# Allegro board A527_REF_LPDDR3_256ball_64X1_S6L_V3_0-C0201.brd
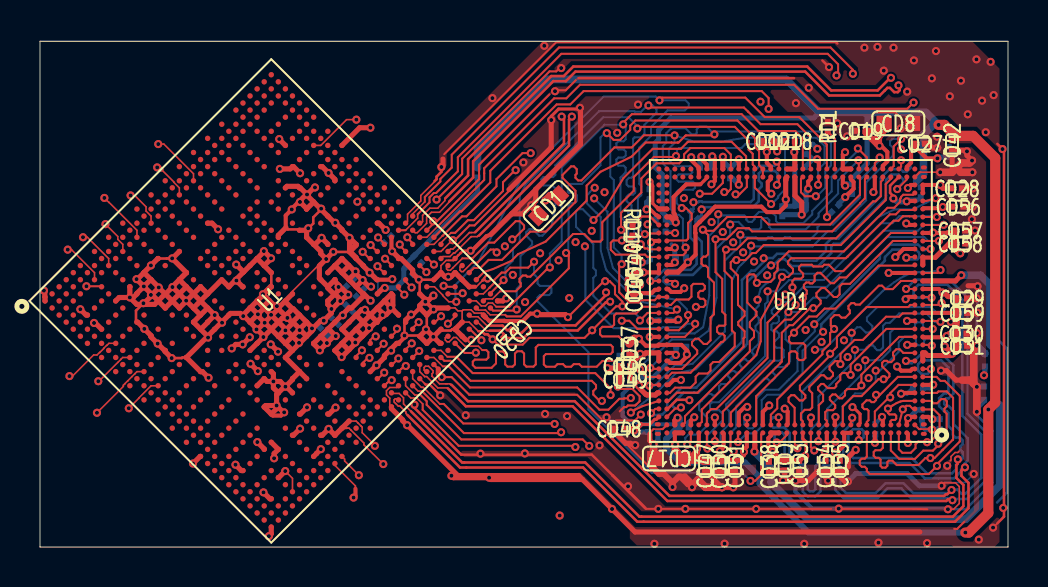
[diagram p0: board, top side]
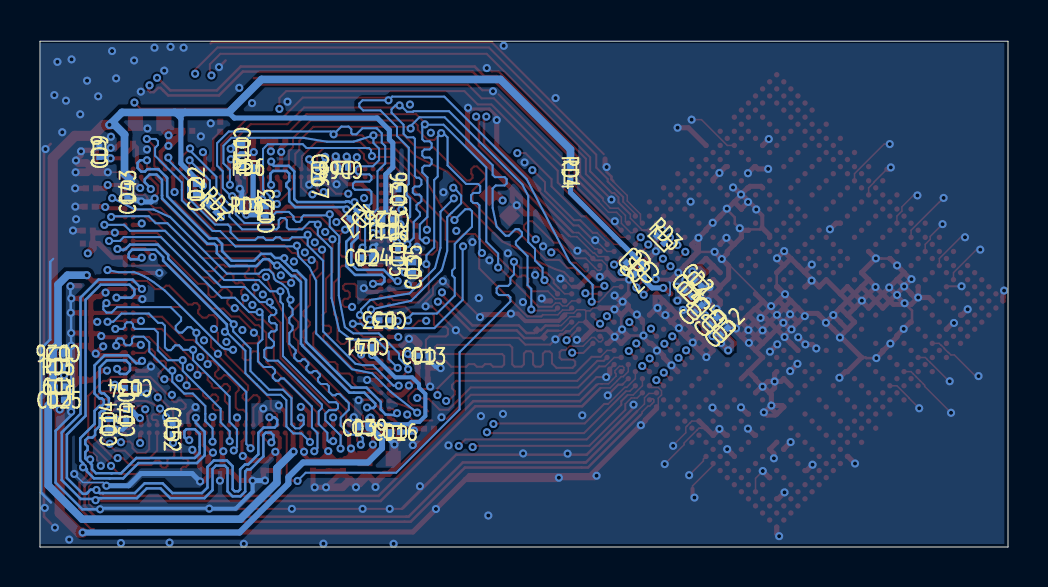
[diagram p1: board, bottom side, seen from below]

Outline 48.41 x 25.3 mm; copper layers: TOP, L2GND, L3, L4, L5GND, BOTTOM. Coordinates in mm from the lower left corner of the outline.
Outline path: 0,25.3 0,0 48.41,0 48.41,25.3 0,25.3

## Design rules (mm)
net group SA: nets SODT2

## Placement (name value [footprint] x y rotation side)
CD1  10uF  [C0603]  25.43 17.07 225 top
CD2  2.2uF  [C0201]  15.5 13.22 225 bottom
CD3  NC/2.2uF  [C0201]  15.49 11.92 135 bottom
CD4  100nF  [C0201]  16 12.72 225 bottom
CD5  100nF  [C0201]  14.73 11.31 135 bottom
CD6  2.2uF  [C0201]  18.89 14.39 315 bottom
CD7  100nF  [C0201]  18.47 13.83 315 bottom
CD8  10uF  [C0603]  42.92 21.19 0 top
CD9  2.2uF  [C0201]  45.44 19.76 90 bottom
CD10  2.2uF  [C0201]  38.3 19.9 90 bottom
CD11  2.2uF  [C0201]  37.23 4.08 270 top
CD12  2.2uF  [C0201]  36.39 20.3 0 top
CD13  2.2uF  [C0201]  29.23 9.57 180 bottom
CD14  2.2uF  [C0201]  45 6.15 270 bottom
CD15  100nF  [C0201]  30.5 14.64 270 bottom
CD16  100nF  [C0201]  30.65 5.75 0 bottom
CD17  10uF  [C0603]  31.45 4.43 180 top
CD18  100nF  [C0201]  37.5 20.3 180 top
CD19  100nF  [C0201]  41.04 20.82 180 top
CD20  NC/2.2pF  [C0201]  23.38 10.67 225 top
CD21  2.2uF  [C0201]  31.04 16.38 180 bottom
CD22  100nF  [C0201]  40.61 17.91 270 bottom
CD23  100nF  [C0201]  37.12 16.8 270 bottom
CD24  2.2uF  [C0201]  32.05 14.49 180 bottom
CD25  100nF  [C0201]  47.46 7.37 180 bottom
CD26  2.2uF  [C0201]  47.5 9.68 180 bottom
CD27  100nF  [C0201]  44.01 20.18 0 top
CD28  100nF  [C0201]  45.86 17.94 0 top
CD29  100nF  [C0201]  46.11 12.43 0 top
CD30  100nF  [C0201]  46.09 10.67 0 top
CD31  100nF  [C0201]  46.11 10.07 0 top
CD32  100nF  [C0201]  14.2 10.78 135 bottom
CD33  100nF  [C0201]  31.19 11.34 0 bottom
CD34  100nF  [C0201]  43.9 7.96 180 bottom
CD35  100nF  [C0201]  29.75 14 90 bottom
CD36  100nF  [C0201]  30.49 17.65 90 bottom
CD37  100nF  [C0201]  29.47 9.92 90 top
CD38  100nF  [C0201]  36.45 4.02 270 top
CD39  100nF  [C0201]  32.19 5.98 0 bottom
CD40  100nF  [C0201]  44.1 6.62 270 bottom
CD41  100nF  [C0201]  32.06 10.02 0 bottom
CD42  100nF  [C0201]  45.6 20.1 270 top
CD43  100nF  [C0201]  44.04 17.74 270 bottom
CD44  100nF  [C0201]  29.72 14.03 90 top
CD45  100nF  [C0201]  29.7 12.86 90 top
CD46  100nF  [C0201]  29.27 9.05 180 top
CD47  100nF  [C0201]  33.26 4.06 270 top
CD48  100nF  [C0201]  28.95 5.92 180 top
CD49  100nF  [C0201]  29.27 8.37 180 top
CD50  100nF  [C0201]  33.98 4.03 270 top
CD51  100nF  [C0201]  34.75 4.06 270 top
CD52  100nF  [C0201]  41.77 5.89 90 bottom
CD53  100nF  [C0201]  37.97 4.06 270 top
CD54  100nF  [C0201]  39.28 4.06 270 top
CD55  100nF  [C0201]  39.99 4.06 270 top
CD56  100nF  [C0201]  45.92 17.03 0 top
CD57  100nF  [C0201]  46.02 15.83 0 top
CD58  100nF  [C0201]  46.02 15.18 0 top
CD59  100nF  [C0201]  46.11 11.71 0 top
CD67  100nF  [C0201]  34.51 18.69 270 bottom
CD68  100nF  [C0201]  33.25 18.98 0 bottom
NOREF  -  []  48.41 0 90 top
NOREF#2  -  []  0 25.3 0 top
RD1  240R-1%  [R0201]  39.39 21.02 270 top
RD2  240R-1%  [R0201]  39.77 16.93 225 bottom
RD3  120R-1%  [R0201]  17.38 15.38 225 bottom
RD4  NC/0R  [R0201]  21.88 18.73 90 bottom
RD5  2K-1%  [R0201]  47.5 9.03 180 bottom
RD6  2K-1%  [R0201]  38 19.01 0 bottom
RD7  100R  [R0201]  32.72 16.59 315 bottom
RD8  2K-1%  [R0201]  38.06 17.09 180 bottom
RD9  2K-1%  [R0201]  47.46 8.03 0 bottom
RD10  240R-1%  [R0201]  29.63 15.83 90 top
RD11  240R-1%  [R0201]  31.03 15.78 0 bottom
U1  A527  [BGA664P50B1700_1700H180]  11.57 12.31 45 top
UD1  LPDDR3-POP256  [BGA256P40B1400_1400H85]  37.55 12.31 180 top

## Library data of the parts
CD1-CD59 CD67 CD68 = C-C0402
RD1-RD11 = R-R0402-1%
U1 = T527/MR527-V1: signal model: BGA-15X15-V1_1_15X15_(S1+S2+S3+_BGA-15x15-V1_1
UD1 = LPDDR3-POP256

## Footprints (pads in the part's own frame, mm; a bottom-side part is the same pattern mirrored in y, then rotated)
BGA256P40B1400_1400H85
  oval 0.3x0.2 smd: A1(-6.65,6.65) A34(6.65,6.65) AN1(-6.65,-6.2) AP1(-6.65,-6.676) B1(-6.65,6.174) B34(6.65,6.174)
  round 0.25 smd: A2(-6.2,6.6) A3(-5.8,6.6) A4(-5.4,6.6) A5(-5,6.6) A6(-4.6,6.6) A7(-4.2,6.6) A8(-3.8,6.6) A9(-3.4,6.6) A10(-3,6.6) A11(-2.6,6.6) A12(-2.2,6.6) A13(-1.8,6.6) A14(-1.4,6.6) A15(-1,6.6) A16(-0.6,6.6) A17(-0.2,6.6) A18(0.2,6.6) A19(0.6,6.6) A20(1,6.6) A21(1.4,6.6) A22(1.8,6.6) A23(2.2,6.6) A24(2.6,6.6) A25(3,6.6) A26(3.4,6.6) A27(3.8,6.6) A28(4.2,6.6) A29(4.6,6.6) A30(5,6.6) A31(5.4,6.6) A32(5.8,6.6) A33(6.2,6.6) AA1(-6.6,-1.4) AA2(-6.2,-1.4) AA33(6.2,-1.4) AA34(6.6,-1.4) AB1(-6.6,-1.8) AB2(-6.2,-1.8) AB33(6.2,-1.8) AB34(6.6,-1.8) AC1(-6.6,-2.2) AC2(-6.2,-2.2) AC33(6.2,-2.2) AC34(6.6,-2.2) AD1(-6.6,-2.6) AD2(-6.2,-2.6) AD33(6.2,-2.6) AD34(6.6,-2.6) AE1(-6.6,-3) AE2(-6.2,-3) AE33(6.2,-3) AE34(6.6,-3) AF1(-6.6,-3.4) AF2(-6.2,-3.4) AF33(6.2,-3.4) AF34(6.6,-3.4) AG1(-6.6,-3.8) AG2(-6.2,-3.8) AG33(6.2,-3.8) AG34(6.6,-3.8) AH1(-6.6,-4.2) AH2(-6.2,-4.2) AH33(6.2,-4.2) AH34(6.6,-4.2) AJ1(-6.6,-4.6) AJ2(-6.2,-4.6) AJ33(6.2,-4.6) AJ34(6.6,-4.6) AK1(-6.6,-5) AK2(-6.2,-5) AK33(6.2,-5) AK34(6.6,-5) AL1(-6.6,-5.4) AL2(-6.2,-5.4) AL33(6.2,-5.4) AL34(6.6,-5.4) AM1(-6.6,-5.8) AM2(-6.2,-5.8) AM33(6.2,-5.8) AM34(6.6,-5.8) AN2(-6.2,-6.2) AN3(-5.8,-6.2) AN4(-5.4,-6.2) AN5(-5,-6.2) AN6(-4.6,-6.2) AN7(-4.2,-6.2) AN8(-3.8,-6.2) AN9(-3.4,-6.2) AN10(-3,-6.2) AN11(-2.6,-6.2) AN12(-2.2,-6.2) AN13(-1.8,-6.2) AN14(-1.4,-6.2) AN15(-1,-6.2) AN16(-0.6,-6.2) AN17(-0.2,-6.2) AN18(0.2,-6.2) AN19(0.6,-6.2) AN20(1,-6.2) AN21(1.4,-6.2) AN22(1.8,-6.2) AN23(2.2,-6.2) AN24(2.6,-6.2) AN25(3,-6.2) AN26(3.4,-6.2) AN27(3.8,-6.2) AN28(4.2,-6.2) AN29(4.6,-6.2) AN30(5,-6.2) AN31(5.4,-6.2) AN32(5.8,-6.2) AN33(6.2,-6.2) AN34(6.6,-6.2) AP2(-6.2,-6.6) AP3(-5.8,-6.6) AP4(-5.4,-6.6) AP5(-5,-6.6) AP6(-4.6,-6.6) AP7(-4.2,-6.6) AP8(-3.8,-6.6) AP9(-3.4,-6.6) AP10(-3,-6.6) AP11(-2.6,-6.6) AP12(-2.2,-6.6) AP13(-1.8,-6.6) AP14(-1.4,-6.6) AP15(-1,-6.6) AP16(-0.6,-6.6) AP17(-0.2,-6.6) AP18(0.2,-6.6) AP19(0.6,-6.6) AP20(1,-6.6) AP21(1.4,-6.6) AP22(1.8,-6.6) AP23(2.2,-6.6) AP24(2.6,-6.6) AP25(3,-6.6) AP26(3.4,-6.6) AP27(3.8,-6.6) AP28(4.2,-6.6) AP29(4.6,-6.6) AP30(5,-6.6) AP31(5.4,-6.6) AP32(5.8,-6.6) AP33(6.2,-6.6) AP34(6.6,-6.6) B2(-6.2,6.2) B3(-5.8,6.2) B4(-5.4,6.2) B5(-5,6.2) B6(-4.6,6.2) B7(-4.2,6.2) B8(-3.8,6.2) B9(-3.4,6.2) B10(-3,6.2) B11(-2.6,6.2) B12(-2.2,6.2) B13(-1.8,6.2) B14(-1.4,6.2) B15(-1,6.2) B16(-0.6,6.2) B17(-0.2,6.2) B18(0.2,6.2) B19(0.6,6.2) B20(1,6.2) B21(1.4,6.2) B22(1.8,6.2) B23(2.2,6.2) B24(2.6,6.2) B25(3,6.2) B26(3.4,6.2) B27(3.8,6.2) B28(4.2,6.2) B29(4.6,6.2) B30(5,6.2) B31(5.4,6.2) B32(5.8,6.2) B33(6.2,6.2) C1(-6.6,5.8) C2(-6.2,5.8) C33(6.2,5.8) C34(6.6,5.8) D1(-6.6,5.4) D2(-6.2,5.4) D33(6.2,5.4) D34(6.6,5.4) E1(-6.6,5) E2(-6.2,5) E33(6.2,5) E34(6.6,5) F1(-6.6,4.6) F2(-6.2,4.6) F33(6.2,4.6) F34(6.6,4.6) G1(-6.6,4.2) G2(-6.2,4.2) G33(6.2,4.2) G34(6.6,4.2) H1(-6.6,3.8) H2(-6.2,3.8) H33(6.2,3.8) H34(6.6,3.8) J1(-6.6,3.4) J2(-6.2,3.4) J33(6.2,3.4) J34(6.6,3.4) K1(-6.6,3) K2(-6.2,3) K33(6.2,3) K34(6.6,3) L1(-6.6,2.6) L2(-6.2,2.6) L33(6.2,2.6) L34(6.6,2.6) M1(-6.6,2.2) M2(-6.2,2.2) M33(6.2,2.2) M34(6.6,2.2) N1(-6.6,1.8) N2(-6.2,1.8) N33(6.2,1.8) N34(6.6,1.8) P1(-6.6,1.4) P2(-6.2,1.4) P33(6.2,1.4) P34(6.6,1.4) R1(-6.6,1) R2(-6.2,1) R33(6.2,1) R34(6.6,1) T1(-6.6,0.6) T2(-6.2,0.6) T33(6.2,0.6) T34(6.6,0.6) U1(-6.6,0.2) U2(-6.2,0.2) U33(6.2,0.2) U34(6.6,0.2) V1(-6.6,-0.2) V2(-6.2,-0.2) V33(6.2,-0.2) V34(6.6,-0.2) W1(-6.6,-0.6) W2(-6.2,-0.6) W33(6.2,-0.6) W34(6.6,-0.6) Y1(-6.6,-1) Y2(-6.2,-1) Y33(6.2,-1) Y34(6.6,-1)
BGA664P50B1700_1700H180
  round 0.27 smd: A1(-8,8) A2(-7.5,8) A3(-7,8) A4(-6.5,8) A5(-6,8) A6(-5.5,8) A8(-4.5,8) A10(-3.5,8) A12(-2.5,8) A14(-1.5,8) A16(-0.5,8) A18(0.5,8) A20(1.5,8) A22(2.5,8) A24(3.5,8) A26(4.5,8) A28(5.5,8) A29(6,8) A30(6.5,8) A31(7,8) A32(7.5,8) A33(8,8) AA1(-8,-2) AA2(-7.5,-2) AA3(-7,-2) AA4(-6.5,-2) AA5(-6,-2) AA6(-5.5,-2) AA7(-5,-2) AA9(-4,-2) AA12(-2.5,-2) AA13(-2,-2) AA15(-1,-2) AA16(-0.5,-2) AA18(0.5,-2) AA19(1,-2) AA21(2,-2) AA22(2.5,-2) AA24(3.5,-2) AA26(4.5,-2) AA27(5,-2) AA28(5.5,-2) AA29(6,-2) AA30(6.5,-2) AA31(7,-2) AA32(7.5,-2) AA33(8,-2) AB2(-7.5,-2.5) AB3(-7,-2.5) AB9(-4,-2.5) AB10(-3.5,-2.5) AB11(-3,-2.5) AB12(-2.5,-2.5) AB13(-2,-2.5) AB14(-1.5,-2.5) AB15(-1,-2.5) AB17(0,-2.5) AB24(3.5,-2.5) AB32(7.5,-2.5) AB33(8,-2.5) AC1(-8,-3) AC2(-7.5,-3) AC3(-7,-3) AC4(-6.5,-3) AC5(-6,-3) AC6(-5.5,-3) AC7(-5,-3) AC9(-4,-3) AC15(-1,-3) AC17(0,-3) AC18(0.5,-3) AC19(1,-3) AC20(1.5,-3) AC22(2.5,-3) AC24(3.5,-3) AC26(4.5,-3) AC27(5,-3) AC28(5.5,-3) AC29(6,-3) AC30(6.5,-3) AC31(7,-3) AC32(7.5,-3) AC33(8,-3) AD1(-8,-3.5) AD2(-7.5,-3.5) AD9(-4,-3.5) AD11(-3,-3.5) AD13(-2,-3.5) AD14(-1.5,-3.5) AD15(-1,-3.5) AD20(1.5,-3.5) AD21(2,-3.5) AD22(2.5,-3.5) AD25(4,-3.5) AD32(7.5,-3.5) AD33(8,-3.5) AE1(-8,-4) AE2(-7.5,-4) AE3(-7,-4) AE4(-6.5,-4) AE5(-6,-4) AE6(-5.5,-4) AE7(-5,-4) AE9(-4,-4) AE11(-3,-4) AE12(-2.5,-4) AE13(-2,-4) AE14(-1.5,-4) AE16(-0.5,-4) AE18(0.5,-4) AE19(1,-4) AE20(1.5,-4) AE21(2,-4) AE22(2.5,-4) AE23(3,-4) AE24(3.5,-4) AE25(4,-4) AE26(4.5,-4) AE27(5,-4) AE28(5.5,-4) AE29(6,-4) AE30(6.5,-4) AE31(7,-4) AE32(7.5,-4) AE33(8,-4) AF1(-8,-4.5) AF2(-7.5,-4.5) AF32(7.5,-4.5) AF33(8,-4.5) AG1(-8,-5) AG2(-7.5,-5) AG3(-7,-5) AG4(-6.5,-5) AG5(-6,-5) AG6(-5.5,-5) AG7(-5,-5) AG9(-4,-5) AG11(-3,-5) AG13(-2,-5) AG15(-1,-5) AG17(0,-5) AG19(1,-5) AG21(2,-5) AG23(3,-5) AG25(4,-5) AG28(5.5,-5) AG29(6,-5) AG30(6.5,-5) AG31(7,-5) AG32(7.5,-5) AG33(8,-5) AH1(-8,-5.5) AH2(-7.5,-5.5) AH7(-5,-5.5) AH9(-4,-5.5) AH11(-3,-5.5) AH13(-2,-5.5) AH15(-1,-5.5) AH17(0,-5.5) AH19(1,-5.5) AH21(2,-5.5) AH23(3,-5.5) AH25(4,-5.5) AH27(5,-5.5) AH32(7.5,-5.5) AH33(8,-5.5) AJ1(-8,-6) AJ2(-7.5,-6) AJ3(-7,-6) AJ4(-6.5,-6) AJ5(-6,-6) AJ7(-5,-6) AJ9(-4,-6) AJ11(-3,-6) AJ13(-2,-6) AJ15(-1,-6) AJ17(0,-6) AJ19(1,-6) AJ21(2,-6) AJ23(3,-6) AJ25(4,-6) AJ27(5,-6) AJ30(6.5,-6) AJ31(7,-6) AJ32(7.5,-6) AJ33(8,-6) AK1(-8,-6.5) AK2(-7.5,-6.5) AK5(-6,-6.5) AK7(-5,-6.5) AK9(-4,-6.5) AK11(-3,-6.5) AK13(-2,-6.5) AK15(-1,-6.5) AK17(0,-6.5) AK19(1,-6.5) AK21(2,-6.5) AK23(3,-6.5) AK25(4,-6.5) AK27(5,-6.5) AK29(6,-6.5) AK32(7.5,-6.5) AK33(8,-6.5) AL1(-8,-7) AL2(-7.5,-7) AL3(-7,-7) AL5(-6,-7) AL7(-5,-7) AL9(-4,-7) AL11(-3,-7) AL12(-2.5,-7) AL13(-2,-7) AL14(-1.5,-7) AL15(-1,-7) AL16(-0.5,-7) AL17(0,-7) AL19(1,-7) AL21(2,-7) AL23(3,-7) AL25(4,-7) AL27(5,-7) AL29(6,-7) AL31(7,-7) AL32(7.5,-7) AL33(8,-7) AM1(-8,-7.5) AM2(-7.5,-7.5) AM3(-7,-7.5) AM4(-6.5,-7.5) AM5(-6,-7.5) AM6(-5.5,-7.5) AM7(-5,-7.5) AM8(-4.5,-7.5) AM9(-4,-7.5) AM10(-3.5,-7.5) AM11(-3,-7.5) AM12(-2.5,-7.5) AM13(-2,-7.5) AM14(-1.5,-7.5) AM15(-1,-7.5) AM16(-0.5,-7.5) AM17(0,-7.5) AM18(0.5,-7.5) AM19(1,-7.5) AM20(1.5,-7.5) AM21(2,-7.5) AM22(2.5,-7.5) AM23(3,-7.5) AM24(3.5,-7.5) AM25(4,-7.5) AM26(4.5,-7.5) AM27(5,-7.5) AM28(5.5,-7.5) AM29(6,-7.5) AM30(6.5,-7.5) AM31(7,-7.5) AM32(7.5,-7.5) AM33(8,-7.5) AN1(-8,-8) AN2(-7.5,-8) AN3(-7,-8) AN4(-6.5,-8) AN5(-6,-8) AN6(-5.5,-8) AN7(-5,-8) AN8(-4.5,-8) AN9(-4,-8) AN10(-3.5,-8) AN11(-3,-8) AN13(-2,-8) AN15(-1,-8) AN17(0,-8) AN18(0.5,-8) AN19(1,-8) AN20(1.5,-8) AN21(2,-8) AN22(2.5,-8) AN23(3,-8) AN24(3.5,-8) AN25(4,-8) AN26(4.5,-8) AN27(5,-8) AN28(5.5,-8) AN29(6,-8) AN30(6.5,-8) AN31(7,-8) AN32(7.5,-8) AN33(8,-8) B1(-8,7.5) B2(-7.5,7.5) B3(-7,7.5) B4(-6.5,7.5) B5(-6,7.5) B6(-5.5,7.5) B7(-5,7.5) B8(-4.5,7.5) B9(-4,7.5) B10(-3.5,7.5) B11(-3,7.5) B12(-2.5,7.5) B13(-2,7.5) B14(-1.5,7.5) B15(-1,7.5) B16(-0.5,7.5) B17(0,7.5) B18(0.5,7.5) B19(1,7.5) B20(1.5,7.5) B21(2,7.5) B22(2.5,7.5) B23(3,7.5) B24(3.5,7.5) B25(4,7.5) B26(4.5,7.5) B27(5,7.5) B28(5.5,7.5) B29(6,7.5) B30(6.5,7.5) B31(7,7.5) B32(7.5,7.5) B33(8,7.5) C1(-8,7) C2(-7.5,7) C3(-7,7) C4(-6.5,7) C6(-5.5,7) C7(-5,7) C8(-4.5,7) C9(-4,7) C10(-3.5,7) C11(-3,7) C12(-2.5,7) C13(-2,7) C14(-1.5,7) C15(-1,7) C16(-0.5,7) C17(0,7) C18(0.5,7) C19(1,7) C20(1.5,7) C21(2,7) C22(2.5,7) C23(3,7) C24(3.5,7) C25(4,7) C26(4.5,7) C27(5,7) C28(5.5,7) C29(6,7) C30(6.5,7) C31(7,7) C32(7.5,7) C33(8,7) D1(-8,6.5) D2(-7.5,6.5) D6(-5.5,6.5) D8(-4.5,6.5) D10(-3.5,6.5) D12(-2.5,6.5) D14(-1.5,6.5) D16(-0.5,6.5) D18(0.5,6.5) D20(1.5,6.5) D22(2.5,6.5) D24(3.5,6.5) D26(4.5,6.5) D28(5.5,6.5) D32(7.5,6.5) D33(8,6.5) E1(-8,6) E2(-7.5,6) E3(-7,6) E4(-6.5,6) E5(-6,6) E6(-5.5,6) E8(-4.5,6) E10(-3.5,6) E12(-2.5,6) E14(-1.5,6) E16(-0.5,6) E18(0.5,6) E20(1.5,6) E22(2.5,6) E24(3.5,6) E26(4.5,6) E28(5.5,6) E29(6,6) E30(6.5,6) E31(7,6) E32(7.5,6) E33(8,6) F1(-8,5.5) F2(-7.5,5.5) F6(-5.5,5.5) F8(-4.5,5.5) F10(-3.5,5.5) F12(-2.5,5.5) F14(-1.5,5.5) F16(-0.5,5.5) F18(0.5,5.5) F20(1.5,5.5) F22(2.5,5.5) F24(3.5,5.5) F26(4.5,5.5) F28(5.5,5.5) F32(7.5,5.5) F33(8,5.5) G1(-8,5) G2(-7.5,5) G3(-7,5) G4(-6.5,5) G5(-6,5) G6(-5.5,5) G8(-4.5,5) G10(-3.5,5) G12(-2.5,5) G14(-1.5,5) G16(-0.5,5) G18(0.5,5) G20(1.5,5) G22(2.5,5) G24(3.5,5) G26(4.5,5) G28(5.5,5) G29(6,5) G30(6.5,5) G31(7,5) G32(7.5,5) G33(8,5) H2(-7.5,4.5) H3(-7,4.5) H24(3.5,4.5) H31(7,4.5) H32(7.5,4.5) J1(-8,4) J2(-7.5,4) J3(-7,4) J4(-6.5,4) J5(-6,4) J6(-5.5,4) J7(-5,4) J9(-4,4) J10(-3.5,4) J12(-2.5,4) J13(-2,4) J15(-1,4) J16(-0.5,4) J17(0,4) J18(0.5,4) J19(1,4) J21(2,4) J22(2.5,4) J23(3,4) J26(4.5,4) J28(5.5,4) J29(6,4) J30(6.5,4) J31(7,4) J32(7.5,4) J33(8,4) K2(-7.5,3.5) K3(-7,3.5) K9(-4,3.5) K10(-3.5,3.5) K11(-3,3.5) K12(-2.5,3.5) K13(-2,3.5) K15(-1,3.5) K16(-0.5,3.5) K19(1,3.5) K21(2,3.5) K22(2.5,3.5) K24(3.5,3.5) K25(4,3.5) K26(4.5,3.5) K31(7,3.5) K32(7.5,3.5) L1(-8,3) L2(-7.5,3) L3(-7,3) L4(-6.5,3) L5(-6,3) L6(-5.5,3) L7(-5,3) L9(-4,3) L10(-3.5,3) L12(-2.5,3) L13(-2,3) L15(-1,3) L16(-0.5,3) L17(0,3) L18(0.5,3) L19(1,3) L21(2,3) L22(2.5,3) L24(3.5,3) L26(4.5,3) L27(5,3) L28(5.5,3) L29(6,3) L30(6.5,3) L31(7,3) L32(7.5,3) L33(8,3) M2(-7.5,2.5) M3(-7,2.5) M10(-3.5,2.5) M13(-2,2.5) M16(-0.5,2.5) M18(0.5,2.5) M19(1,2.5) M21(2,2.5) M22(2.5,2.5) M31(7,2.5) M32(7.5,2.5) N1(-8,2) N2(-7.5,2) N3(-7,2) N4(-6.5,2) N5(-6,2) N6(-5.5,2) N7(-5,2) N9(-4,2) N10(-3.5,2) N12(-2.5,2) N13(-2,2) N15(-1,2) N18(0.5,2) N19(1,2) N21(2,2) N22(2.5,2) N24(3.5,2) N26(4.5,2) N27(5,2) N28(5.5,2) N29(6,2) N30(6.5,2) N31(7,2) N32(7.5,2) N33(8,2) P2(-7.5,1.5) P3(-7,1.5) P9(-4,1.5) P11(-3,1.5) P13(-2,1.5) P16(-0.5,1.5) P18(0.5,1.5) P19(1,1.5) P21(2,1.5) P22(2.5,1.5) P24(3.5,1.5) P31(7,1.5) P32(7.5,1.5) R1(-8,1) R2(-7.5,1) R3(-7,1) R4(-6.5,1) R5(-6,1) R6(-5.5,1) R7(-5,1) R11(-3,1) R13(-2,1) R15(-1,1) R17(0,1) R18(0.5,1) R19(1,1) R22(2.5,1) R24(3.5,1) R26(4.5,1) R27(5,1) R28(5.5,1) R29(6,1) R30(6.5,1) R31(7,1) R32(7.5,1) R33(8,1) T2(-7.5,0.5) T3(-7,0.5) T9(-4,0.5) T11(-3,0.5) T13(-2,0.5) T15(-1,0.5) T16(-0.5,0.5) T18(0.5,0.5) T19(1,0.5) T21(2,0.5) T22(2.5,0.5) T24(3.5,0.5) T31(7,0.5) T32(7.5,0.5) U1(-8,0) U2(-7.5,0) U3(-7,0) U4(-6.5,0) U5(-6,0) U6(-5.5,0) U7(-5,0) U8(-4.5,0) U10(-3.5,0) U12(-2.5,0) U13(-2,0) U14(-1.5,0) U16(-0.5,0) U18(0.5,0) U19(1,0) U21(2,0) U22(2.5,0) U25(4,0) U26(4.5,0) U27(5,0) U28(5.5,0) U29(6,0) U30(6.5,0) U31(7,0) U32(7.5,0) U33(8,0) V2(-7.5,-0.5) V3(-7,-0.5) V18(0.5,-0.5) V19(1,-0.5) V31(7,-0.5) V32(7.5,-0.5) W1(-8,-1) W2(-7.5,-1) W3(-7,-1) W4(-6.5,-1) W5(-6,-1) W6(-5.5,-1) W7(-5,-1) W9(-4,-1) W10(-3.5,-1) W12(-2.5,-1) W13(-2,-1) W15(-1,-1) W16(-0.5,-1) W19(1,-1) W21(2,-1) W22(2.5,-1) W23(3,-1) W24(3.5,-1) W25(4,-1) W27(5,-1) W28(5.5,-1) W29(6,-1) W30(6.5,-1) W31(7,-1) W32(7.5,-1) W33(8,-1) Y2(-7.5,-1.5) Y3(-7,-1.5) Y9(-4,-1.5) Y10(-3.5,-1.5) Y12(-2.5,-1.5) Y13(-2,-1.5) Y15(-1,-1.5) Y18(0.5,-1.5) Y19(1,-1.5) Y21(2,-1.5) Y22(2.5,-1.5) Y23(3,-1.5) Y24(3.5,-1.5) Y26(4.5,-1.5) Y31(7,-1.5) Y32(7.5,-1.5)
C0201
  rect 0.3x0.3 smd: 1(-0.25,0) 2(0.25,0)
C0603
  rect 0.76x0.76 smd: 1(-0.71,0) 2(0.71,0)
R0201
  rect 0.3x0.3 smd: 1(-0.25,0) 2(0.25,0)

## Nets
GND: CD1.2 CD2.2 CD3.2 CD4.2 CD5.2 CD6.2 CD7.2 CD8.2 CD9.2 CD10.2 CD11.2 CD12.2 CD13.2 CD14.2 CD15.2 CD16.2 CD17.2 CD18.2 CD19.2 CD21.2 CD22.2 CD23.2 CD24.2 CD25.2 CD26.2 CD27.2 CD28.2 CD29.2 CD30.2 CD31.2 CD32.2 CD33.2 CD34.2 CD35.2 CD36.2 CD37.2 CD38.2 CD39.2 CD40.2 CD41.2 CD42.2 CD43.2 CD44.2 CD45.2 CD46.2 CD47.2 CD48.2 CD49.2 CD50.2 CD51.2 CD52.2 CD53.2 CD54.2 CD55.2 CD56.2 CD57.2 CD58.2 CD59.2 CD67.2 CD68.2 RD1.1 RD2.1 RD3.1 RD8.1 RD9.1 RD10.1 RD11.1 U1.A1(GND0) U1.AA15(GND87) U1.AA16(GND88) U1.AA18(GND89) U1.AA21(GND90) U1.AA22(GND91) U1.AA26(GND92) U1.AA30(GND93) U1.AA32(GND94) U1.AB10(GND95) U1.AB11(GND96) U1.AB12(GND97) U1.AB14(GND98) U1.AB15(GND99) U1.AB17(GND100) U1.AC1(GND101) U1.AC26(GND102) U1.AC29(GND103) U1.AC33(GND104) U1.AD9(GND105) U1.AD11(GND106) U1.AD13(GND107) U1.AD14(GND108) U1.AD20(GND109) U1.AD21(GND110) U1.AD22(GND111) U1.AE9(GND112) U1.AE12(GND113) U1.AE14(GND114) U1.AE18(GND115) U1.AE19(GND116) U1.AE20(GND117) U1.AE21(GND118) U1.AE22(GND119) U1.AE23(GND120) U1.AE24(GND121) U1.AE25(GND122) U1.AE26(GND123) U1.AE29(GND124) U1.AE32(GND125) U1.AG3(GND126) U1.AG6(GND127) U1.AG7(GND128) U1.AG11(GND129) U1.AG25(GND130) U1.AG28(GND131) U1.AG30(SA1) U1.AG31(GND132) U1.AG33(GND133) U1.AH7(GND134) U1.AH9(GND135) U1.AH25(SA4) U1.AH27(GND136) U1.AH32(GND137) U1.AJ13(GND138) U1.AJ19(GND139) U1.AJ21(GND140) U1.AJ23(GND141) U1.AJ27(SA16) U1.AJ32(SA11) U1.AK5(GND142) U1.AK11(GND143) U1.AK25(SBA0) U1.AK29(SA13) U1.AK32(GND144) U1.AL3(GND145) U1.AL9(GND146) U1.AL12(GND147) U1.AL13(GND148) U1.AL14(GND149) U1.AL25(SA8) U1.AL27(SA3) U1.AM5(GND150) U1.AM20(GND151) U1.AM26(GND152) U1.AM28(SA14) U1.AM29(GND153) U1.AN1(GND154) U1.AN10(GND155) U1.AN11(GND156) U1.AN18(GND157) U1.AN22(GND158) U1.AN24(GND159) U1.AN28(GND160) U1.AN31(GND161) U1.AN33(GND162) U1.C6(GND1) U1.C8(GND2) U1.C10(GND3) U1.C12(GND4) U1.C14(GND5) U1.C18(GND6) U1.C20(GND7) U1.D6(GND8) U1.E3(GND9) U1.F6(GND10) U1.F8(GND11) U1.F10(GND12) U1.F12(GND13) U1.G3(GND14) U1.G8(GND15) U1.G10(GND16) U1.G14(GND17) U1.G18(GND18) U1.G29(GND19) U1.J3(GND20) U1.J6(GND21) U1.J9(GND22) U1.J10(GND23) U1.J12(GND24) U1.J13(GND25) U1.J28(GND26) U1.J31(GND27) U1.K9(GND28) U1.K10(GND29) U1.K11(GND30) U1.K12(GND31) U1.K26(GND32) U1.L3(GND33) U1.L6(GND34) U1.L10(GND35) U1.L12(GND36) U1.L13(GND37) U1.L27(GND38) U1.L30(GND39) U1.L33(GND40) U1.M13(GND41) U1.N3(GND42) U1.N6(GND43) U1.N10(GND44) U1.N12(GND45) U1.N15(GND46) U1.N18(GND47) U1.N19(GND48) U1.N22(GND49) U1.N26(GND50) U1.N27(GND51) U1.N30(GND52) U1.P11(GND53) U1.P16(GND54) U1.P19(GND55) U1.P24(GND56) U1.R3(GND57) U1.R7(GND58) U1.R11(GND59) U1.R13(GND60) U1.R19(GND61) U1.R24(GND62) U1.R27(GND63) U1.T15(GND64) U1.T16(GND65) U1.T18(GND66) U1.T24(GND67) U1.U7(GND68) U1.U14(GND69) U1.U16(GND70) U1.U25(GND71) U1.U27(GND72) U1.V18(GND73) U1.V19(GND74) U1.W12(GND75) U1.W13(GND76) U1.W15(GND77) U1.W16(GND78) U1.W22(GND79) U1.W27(GND80) U1.W30(GND81) U1.Y15(GND82) U1.Y18(GND83) U1.Y22(GND84) U1.Y23(GND85) U1.Y26(GND86) UD1.AA2(VSS_24) UD1.AB33(VSS_25) UD1.AD2(VSS_26) UD1.AD33(VSS_27) UD1.AG2(VSS_28) UD1.AJ33(VSS_29) UD1.AJ34(VSS_30) UD1.AK2(VSS_31) UD1.AN2(VSS_32) UD1.AN4(VSS_33) UD1.AN7(VSS_34) UD1.AN10(VSS_35) UD1.AN15(VSS_36) UD1.AN17(VSS_37) UD1.AN20(VSS_38) UD1.AN24(VSS_39) UD1.AN27(VSS_40) UD1.AN29(VSS_41) UD1.AP27(VSS_42) UD1.AP29(VSS_43) UD1.B2(VSS_1) UD1.B6(VSS_2) UD1.B9(VSS_3) UD1.B12(VSS_4) UD1.B15(VSS_5) UD1.B18(VSS_6) UD1.B21(VSS_7) UD1.B24(VSS_8) UD1.B27(VSS_9) UD1.B30(VSS_10) UD1.B33(VSS_11) UD1.D33(VSS_12) UD1.F2(VSS_13) UD1.G33(VSS_14) UD1.J2(VSS_15) UD1.K33(VSS_16) UD1.M2(VSS_17) UD1.M33(VSS_18) UD1.M34(VSS_19) UD1.R2(VSS_20) UD1.R33(VSS_21) UD1.V2(VSS_22) UD1.W33(VSS_23)
VCC-DRAM: CD1.1 CD2.1 CD3.1 CD4.1 CD5.1 CD8.1 CD9.1 CD10.1 CD11.1 CD12.1 CD13.1 CD14.1 CD15.1 CD16.1 CD17.1 CD18.1 CD19.1 CD27.1 CD28.1 CD29.1 CD30.1 CD31.1 CD32.1 CD33.1 CD34.1 CD35.1 CD36.1 CD37.1 CD38.1 CD44.1 CD45.1 CD46.1 CD47.1 CD48.1 CD49.1 CD50.1 CD51.1 CD52.1 CD53.1 CD54.1 CD55.1 CD56.1 CD57.1 CD58.1 CD59.1 CD67.1 CD68.1 RD5.2 RD6.2 U1.AA24(VCC-DRAM4) U1.AB24(VCC-DRAM5) U1.AC17(VCC-DRAML0) U1.AC18(VCC-DRAML1) U1.AC19(VCC-DRAML2) U1.AC20(VCC-DRAML3) U1.AC22(VCC-DRAML4) U1.AC24(VCC-DRAM6) U1.W23(VCC-DRAM0) U1.W24(VCC-DRAM1) U1.W25(VCC-DRAM2) U1.Y24(VCC-DRAM3) UD1.A3(VDD2_1) UD1.A7(VDDQ_1) UD1.A10(VDDQ_2) UD1.A11(VDD2_2) UD1.A13(VDDQ_3) UD1.A16(VDDQ_4) UD1.A19(VDDQ_5) UD1.A20(VDD2_3) UD1.A23(VDDQ_6) UD1.A26(VDDQ_7) UD1.A29(VDDQ_8) UD1.A31(VDDQ_9) UD1.A32(VDD2_4) UD1.AA34(VDD2_9) UD1.AB1(VDD2_10) UD1.AB34(VDDCA_3) UD1.AC1(VDDQ_18) UD1.AE34(VDDCA_4) UD1.AF1(VDDQ_19) UD1.AH34(VDD2_11) UD1.AJ1(VDDQ_20) UD1.AL1(VDDQ_21) UD1.AM1(VDD2_12) UD1.AP3(VDDQ_22) UD1.AP6(VDDQ_23) UD1.AP10(VDDQ_24) UD1.AP11(VDD2_13) UD1.AP14(VDDCA_5) UD1.AP17(VDDCA_6) UD1.AP18(VDD2_14) UD1.AP20(VDDCA_7) UD1.AP24(VDD2_15) UD1.AP26(VDDCA_8) UD1.AP28(VDD2_16) UD1.C1(VDD2_5) UD1.C34(VDDQ_10) UD1.F34(VDDQ_11) UD1.G1(VDDQ_12) UD1.K1(VDDQ_13) UD1.K34(VDDQ_14) UD1.L1(VDD2_6) UD1.L34(VDD2_7) UD1.N1(VDDQ_15) UD1.N34(VDDCA_1) UD1.R34(VDD2_8) UD1.T1(VDDQ_16) UD1.W1(VDDQ_17) UD1.W34(VDDCA_2)
VDD18-DRAM: CD6.1 CD7.1 RD4.1 U1.AD25(VDD18-DRAM)
VDD18-LPDDR: CD21.1 CD22.1 CD39.1 CD40.1 CD41.1 CD42.1 CD43.1 RD4.2 UD1.AH33(VDD1_5) UD1.AM2(VDD1_6) UD1.AN11(VDD1_7) UD1.AN28(VDD1_8) UD1.B3(VDD1_1) UD1.B32(VDD1_2) UD1.C2(VDD1_3) UD1.L33(VDD1_4)
SA0: U1.AN27(SA6) UD1.AN26(CA0_A) UD1.N33(CA0_B)
SA1: U1.AN29(SA15) UD1.AP25(CA1_A) UD1.P34(CA1_B)
SA2: U1.AJ30(SA17) UD1.AN25(CA2_A) UD1.P33(CA2_B)
SA3: U1.AK27(SA5) UD1.AP23(CA3_A) UD1.T34(CA3_B)
SA4: U1.AJ31(SA9) UD1.AN23(CA4_A) UD1.T33(CA4_B)
SA5: U1.AL31(SA12) UD1.AC34(CA5_B) UD1.AP16(CA5_A)
SA6: U1.AK33(SA0) UD1.AC33(CA6_B) UD1.AN16(CA6_A)
SA7: U1.AM33(SA7) UD1.AD34(CA7_B) UD1.AP15(CA7_A)
SA8: U1.AJ33(SA2) UD1.AE33(CA8_B) UD1.AN14(CA8_A)
SA9: U1.AG29(SA10) UD1.AF34(CA9_B) UD1.AP13(CA9_A)
SCKE0: U1.AM31(SCKE0) UD1.AN21(CKE1_A) UD1.AP21(CKE0_A) UD1.V33(CKE1_B) UD1.V34(CKE0_B)
SCKN: CD20.2 RD7.2 U1.AN30(SCKN) UD1.AN19(CK_C_A) UD1.Y33(CK_C_B)
SCKP: CD20.1 RD7.1 U1.AM30(SCKP) UD1.AP19(CK_T_A) UD1.Y34(CK_T_B)
SCS0: U1.AN32(SCS0) UD1.AP22(CS0_N_A)
SCS1: U1.AM32(SCS1) UD1.AN22(CS1_N_A)
SCS2: U1.AM27(SBG1) UD1.U34(CS0_N_B)
SCS3: U1.AL29(SACT) UD1.U33(CS1_N_B)
SDQ0: U1.AE28(SDQ0) UD1.AN6(DQ26_B) UD1.F33(DQ21_A)
SDQ1: U1.AE27(SDQ1) UD1.AP5(DQ24_B) UD1.E34(DQ23_A)
SDQ2: U1.AG32(SDQ2) UD1.AN9(DQ31_B) UD1.J33(DQ16_A)
SDQ3: U1.AH33(SDQ3) UD1.AP8(DQ28_B) UD1.H34(DQ19_A)
SDQ4: U1.AE30(SDQ4) UD1.AP9(DQ30_B) UD1.J34(DQ17_A)
SDQ5: U1.AD32(SDQ5) UD1.AP7(DQ27_B) UD1.G34(DQ20_A)
SDQ6: U1.AE31(SDQ6) UD1.AN8(DQ29_B) UD1.H33(DQ18_A)
SDQ7: U1.AD33(SDQ7) UD1.AN5(DQ25_B) UD1.E33(DQ22_A)
SDQ8: U1.AC27(SDQ8) UD1.A30(DQ0_A) UD1.AK1(DQ15_B)
SDQ9: U1.AC28(SDQ9) UD1.AJ2(DQ14_B) UD1.B29(DQ1_A)
SDQ10: U1.AC30(SDQ10) UD1.A27(DQ4_A) UD1.AG1(DQ11_B)
SDQ11: U1.AC31(SDQ11) UD1.A28(DQ3_A) UD1.AH1(DQ12_B)
SDQ12: U1.AA33(SDQ12) UD1.AF2(DQ10_B) UD1.B26(DQ5_A)
SDQ13: U1.AA31(SDQ13) UD1.AH2(DQ13_B) UD1.B28(DQ2_A)
SDQ14: U1.AA28(SDQ14) UD1.AE2(DQ9_B) UD1.B25(DQ6_A)
SDQ15: U1.AA27(SDQ15) UD1.A25(DQ7_A) UD1.AE1(DQ8_B)
SDQ16: U1.AM25(SDQ16) UD1.B14(DQ13_A) UD1.P2(DQ2_B)
SDQ17: U1.AN25(SDQ17) UD1.A14(DQ12_A) UD1.P1(DQ3_B)
SDQ18: U1.AH23(SDQ18) UD1.A17(DQ8_A) UD1.U1(DQ7_B)
SDQ19: U1.AK23(SDQ19) UD1.B17(DQ9_A) UD1.U2(DQ6_B)
SDQ20: U1.AL23(SDQ20) UD1.A15(DQ11_A) UD1.R1(DQ4_B)
SDQ21: U1.AM22(SDQ21) UD1.B13(DQ14_A) UD1.N2(DQ1_B)
SDQ22: U1.AN21(SDQ22) UD1.A12(DQ15_A) UD1.M1(DQ0_B)
SDQ23: U1.AG21(SDQ23) UD1.B16(DQ10_A) UD1.T2(DQ5_B)
SDQ24: U1.AG19(SDQ24) UD1.A4(DQ30_A) UD1.D1(DQ17_B)
SDQ25: U1.AH19(SDQ25) UD1.A5(DQ28_A) UD1.E1(DQ19_B)
SDQ26: U1.AK19(SDQ26) UD1.A6(DQ27_A) UD1.F1(DQ20_B)
SDQ27: U1.AL19(SDQ27) UD1.A8(DQ24_A) UD1.H1(DQ23_B)
SDQ28: U1.AM21(SDQ28) UD1.B8(DQ25_A) UD1.H2(DQ22_B)
SDQ29: U1.AL21(SDQ29) UD1.B4(DQ31_A) UD1.D2(DQ16_B)
SDQ30: U1.AK21(SDQ30) UD1.B7(DQ26_A) UD1.G2(DQ21_B)
SDQ31: U1.AH21(SDQ31) UD1.B5(DQ29_A) UD1.E2(DQ18_B)
SDQM0: U1.AE33(SDQM0) UD1.AL2(DM3_B) UD1.B31(DM2_A)
SDQM1: U1.AC32(SDQM1) UD1.AB2(DM1_B) UD1.B22(DM0_A)
SDQM2: U1.AM24(SDQM2) UD1.B20(DM1_A) UD1.Y2(DM0_B)
SDQM3: U1.AN20(SDQM3) UD1.B11(DM3_A) UD1.L2(DM2_B)
SDQS0N: U1.AF33(SDQS0N) UD1.AN3(DQS3_C_B) UD1.C33(DQS2_C_A)
SDQS0P: U1.AF32(SDQS0P) UD1.AP4(DQS3_T_B) UD1.D34(DQS2_T_A)
SDQS1N: U1.AB33(SDQS1N) UD1.A24(DQS0_C_A) UD1.AC2(DQS1_C_B)
SDQS1P: U1.AB32(SDQS1P) UD1.AD1(DQS1_T_B) UD1.B23(DQS0_T_A)
SDQS2N: U1.AN23(SDQS2N) UD1.B19(DQS1_C_A) UD1.V1(DQS0_C_B)
SDQS2P: U1.AM23(SDQS2P) UD1.A18(DQS1_T_A) UD1.W2(DQS0_T_B)
SDQS3N: U1.AN19(SDQS3N) UD1.B10(DQS3_C_A) UD1.K2(DQS2_C_B)
SDQS3P: U1.AM19(SDQS3P) UD1.A9(DQS3_T_A) UD1.J1(DQS2_T_B)
SODT0: U1.AL32(SODT0) UD1.A21(ODT_A)
SODT2: U1.AJ25(SBA1) UD1.AA1(ODT_B)
SVREF: CD23.1 CD24.1 RD6.1 RD8.2 UD1.AA33(VREF(CA)_B) UD1.AN18(VREF(CA)_A)
VREFDQ: CD25.1 CD26.1 RD5.1 RD9.2 UD1.A22(VREF(DQ)_A) UD1.Y1(VREF(DQ)_B)
N16555902: RD1.2 UD1.AP12(ZQ1_A/NC)
N16555906: RD2.2 UD1.AN13(ZQ0_A)
N16558013: RD10.2 UD1.AG34(ZQ1_B/NC)
N16558017: RD11.2 UD1.AF33(ZQ0_B)
N16671738: RD3.2 U1.AA29(SZQ)

Pads without a net: U1 A2 A3 A4 A5 A6 A8 A10 A12 A14 A16 A18 A20 A22 A24 A26 A28 A29 A30 A31 A32 A33 AA1 AA2 AA3 AA4 AA5 AA6 AA7 AA9 AA12 AA13 AA19 AB2 AB3 AB9 AB13 AC2 AC3 AC4 AC5 AC6 AC7 AC9 AC15 AD1 AD2 AD15 AE1 AE2 AE3 AE4 AE5 AE6 AE7 AE11 AE13 AE16 AF1 AF2 AG1 AG2 AG4 AG5 AG9 AG13 AG15 AG17 AG23 AH1 AH2 AH11 AH13 AH15 AH17 AJ1 AJ2 AJ3 AJ4 AJ5 AJ7 AJ9 AJ11 AJ15 AJ17 AK1 AK2 AK7 AK9 AK13 AK15 AK17 AL1 AL2 AL5 AL7 AL11 AL15 AL16 AL17 AL33 AM1 AM2 AM3 AM4 AM6 AM7 AM8 AM9 AM10 AM11 AM12 AM13 AM14 AM15 AM16 AM17 AM18 AN2 AN3 AN4 AN5 AN6 AN7 AN8 AN9 AN13 AN15 AN17 AN26 B1 B2 B3 B4 B5 B6 B7 B8 B9 B10 B11 B12 B13 B14 B15 B16 B17 B18 B19 B20 B21 B22 B23 B24 B25 B26 B27 B28 B29 B30 B31 B32 B33 C1 C2 C3 C4 C7 C9 C11 C13 C15 C16 C17 C19 C21 C22 C23 C24 C25 C26 C27 C28 C29 C30 C31 C32 C33 D1 D2 D8 D10 D12 D14 D16 D18 D20 D22 D24 D26 D28 D32 D33 E1 E2 E4 E5 E6 E8 E10 E12 E14 E16 E18 E20 E22 E24 E26 E28 E29 E30 E31 E32 E33 F1 F2 F14 F16 F18 F20 F22 F24 F26 F28 F32 F33 G1 G2 G4 G5 G6 G12 G16 G20 G22 G24 G26 G28 G30 G31 G32 G33 H2 H3 H24 H31 H32 J1 J2 J4 J5 J7 J15 J16 J17 J18 J19 J21 J22 J23 J26 J29 J30 J32 J33 K2 K3 K13 K15 K16 K19 K21 K22 K24 K25 K31 K32 L1 L2 L4 L5 L7 L9 L15 L16 L17 L18 L19 L21 L22 L24 L26 L28 L29 L31 L32 M2 M3 M10 M16 M18 M19 M21 M22 M31 M32 N1 N2 N4 N5 N7 N9 N13 N21 N24 N28 N29 N31 N32 N33 P2 P3 P9 P13 P18 P21 P22 P31 P32 R1 R2 R4 R5 R6 R15 R17 R18 R22 R26 R28 R29 R30 R31 R32 R33 T2 T3 T9 T11 T13 T19 T21 T22 T31 T32 U1 U2 U3 U4 U5 U6 U8 U10 U12 U13 U18 U19 U21 U22 U26 U28 U29 U30 U31 U32 U33 V2 V3 V31 V32 W1 W2 W3 W4 W5 W6 W7 W9 W10 W19 W21 W28 W29 W31 W32 W33 Y2 Y3 Y9 Y10 Y12 Y13 Y19 Y21 Y31 Y32; UD1 A1 A2 A33 A34 AG33 AK33 AK34 AL33 AL34 AM33 AM34 AN1 AN12 AN30 AN31 AN32 AN33 AN34 AP1 AP2 AP30 AP31 AP32 AP33 AP34 B1 B34

## Via types
v1: diameter 0.406, hole 0.203, TOP to BOTTOM, 547 vias

## Routing (per net, layer and track width the routed paths; a pad name or vN(x,y) marks a point on that pad's centre or on a via; arc(x,y) is an arc through that point)
GND: length 658.6
  TOP w0.076: v1(4.44,6.94) 4.95,7.45 4.95,7.46 5.56,8.07 U1.R3 ; 21.76,13.02 21.82,13.02 22.14,13.34 ; v1(2.85,6.71) 4.17,8.03 4.17,8.09 4.24,8.17 4.24,8.17 4.39,8.32 4.6,8.52 4.74,8.67 4.74,8.67 4.85,8.77 U1.N3 ; v1(1.39,14.88) 1.41,14.86 1.59,14.86 2.73,13.72 U1.C6 ; U1.C18 6.97,17.97 6.69,18.25 6.69,18.27 6.06,18.9 ; 45.97,4.8 45.9,4.73 45.76,4.73 45.56,4.53 45.56,4.35 45.51,4.3 ; 15.77,2.91 15.77,3.06 14.75,4.08 U1.AN10 ; v1(2.15,15.5) 2.37,15.5 3.43,14.43 U1.C8 ; U1.C14 5.55,16.2 5.55,16.55 5.31,16.8 5.31,17.02 4.73,17.59 v1(4.53,17.59) ; U1.C12 4.85,15.84 3.46,17.24 3.44,17.24 v1(3.22,17.46) ; U1.AM20 17.84,7.98 17.49,7.98 17.33,7.82 17.33,7.61 17.49,7.45 17.49,7.09 U1.AN18 ; 21.29,10.37 v1(21.56,10.37) ; 20.41,14.34 20.31,14.34 20.05,14.08 20.05,13.72 ; 13.69,20.09 14.04,20.09 15.33,21.38 v1(15.82,21.38) ; U1.V19 12.63,12.79 13.96,14.13 14.04,14.13 ; U1.AK29 20.76,11.96 20.9,11.81 21.11,11.81 ; v1(15.95,3.59) 15.23,4.31 15.23,4.4 U1.AN11 ; U1.C10 4.14,15.14 3.89,15.39 3.89,15.53 v1(3.27,16.15) ; U1.AM5 12.63,3.44 v1(12.26,3.8) ; v1(16.75,5.06) 16.75,5.08 16.11,5.72 16.11,6 16.06,6.05 15.81,6.3 U1.AL14 ; U1.AA32 18.38,16.3 18.38,16.65 19.04,17.31 19.04,17.59 19.74,18.28 19.74,18.3 ; 44.03,18.75 45.02,18.75 v1(45.02,18.75) ; U1.J3 3.45,10.19 3.34,10.08 3.33,10.08 3.18,9.94 3.18,9.92 2.99,9.73 2.98,9.73 2.85,9.61 2.68,9.61 1.63,8.55 v1(1.47,8.55) ; U1.AN31 22.07,11.7 21.72,11.7 21.55,11.87 21.17,11.87 21.11,11.81 ; v1(20.64,15.35) 20.61,15.35 20.14,14.88 20.14,14.88 20.05,14.78 U1.AE32 ; U1.AG33 20.67,14.34 ; U1.C20 7.68,18.67 6.19,20.16 v1(5.91,20.16) ; 21.11,11.81 U1.AM29 21.46,11.25 21.92,10.79 21.92,10.79 ; U1.L3 4.14,9.48 4.04,9.38 4.04,9.38 3.89,9.23 3.89,9.23 2.95,8.29 v1(2.91,8.29) ; 17.16,4.15 16.2,5.11 16.2,5.2 15.56,5.84 15.45,5.95 15.35,5.95 ; 44.03,5.9 44.52,5.9 ; 31.07,5.9 30.67,5.9 ; v1(47.66,0.97) 47.87,1.19 ; 42.93,21.58 42.79,21.72 41.71,21.72 41.59,21.6 ; U1.AN22 19.25,8.16 ; v1(45.4,1.89) 45.68,1.89 45.97,2.18 45.97,3.02 45.79,3.21 45.23,3.21 v1(45.09,3.07)
  TOP w0.102: 30.67,5.9 30.5,5.72 30.5,5.65 ; v1(20.09,8.5) 20.58,8.5 21.47,7.61 26.86,7.61 28.08,6.4 ; v1(39.94,1.92) 39.98,1.92 39.99,1.91 43.69,1.91 44.38,1.89 ; 25.77,22.79 v1(25.75,22.8) 25.8,22.85 26.29,22.85 26.79,23.35 ; UD1.B2 43.96,5.9 44.03,5.9 ; 23.45,17.88 23.45,17.81 21.73,16.09 21.48,16.09 20.74,15.35 v1(20.64,15.35) ; v1(19.68,11.89) 19.66,11.87 19.61,11.87 ; 29.29,5.19 30.46,4.02 30.6,4.02 ; 28.99,6.79 29.2,7 29.32,7 29.4,7.08 29.76,7.08 29.8,7.12 29.82,7.12 29.99,7.29 29.99,7.55 29.62,7.91 29,7.91 28.9,8.01 v1(28.9,8.02) ; U1.AC33 19.66,16.16 v1(19.66,16.29) 19.85,16.29 21.96,18.4 21.96,19.12 25.48,22.65 ; 31.07,5.9 31.13,5.9 UD1.B33 ; 39.57,1.91 v1(35.81,1.91) v1(32.27,1.91) v1(30.92,1.91) 30.31,1.91 30.26,1.95 ; UD1.AN2 43.99,18.75 44.03,18.75 ; 20.94,14.61 U1.AG33 ; 20.94,14.61 21.02,14.69 21.03,14.69 ; 20.94,14.61 U1.AG33 ; U1.AG33 20.67,14.34 20.41,14.34 ; U1.D6 3.05,13.04 v1(2.32,13.04) ; v1(19.83,17.38) 21.11,18.66 21.11,19.42 25.48,23.79 25.82,23.79 25.98,23.96 v1(26.06,23.96) ; v1(22.63,10.39) 22.9,10.13 24.14,10.13 24.47,10.46 27.23,10.46 v1(27.61,10.84) 28.81,12.04 v1(29.12,12.04) 29.12,12.27 28.75,12.65 28.75,13.04 28.49,13.3 v1(28.26,13.3) 28.2,13.3 v1(26.4,11.5) ; 12.95,5.92 v1(13.01,5.92) ; 4.88,13.4 U1.F10 ; UD1.B9 40.95,6.13 ; 20.21,19.65 25.82,25.26 ; 45.72,0.91 45.86,0.91 46.21,1.25 ; v1(30.04,6.63) 29.75,6.33 28.79,6.33 ; U1.AL13 15.35,5.95
  TOP w0.114: 19.25,8.16 19.29,8.12 19.49,8.12 19.8,7.81 19.87,7.74 19.87,7.73 v1(20.02,7.59) ; 19.92,8.91 U1.AN24 ; 17.16,4.15 v1(17.17,4.15)
  TOP w0.127: U1.AJ27 19.34,10.94 19.3,10.9 v1(19.3,10.89) ; 47.87,1.19 48.21,1.52 48.21,19.83 v1(48.13,19.91) 47.87,20.17 ; v1(13.41,15.95) 13.42,15.95 13.43,15.95 13.66,16.18 13.66,16.49 14.06,16.89 ; U1.T18 U1.R19 ; 12.3,15.97 12.39,15.89 12.94,15.89 U1.P24 ; U1.AG28 18.99,13.33 18.95,13.37 U1.AG30 ; U1.AK25 18.95,10.58 v1(18.23,10.58) 18.23,11.19 U1.AH25 ; v1(32.47,7.34) 32.47,7.35 32.44,7.35 32.43,7.36 31.84,7.36 31.39,6.91 UD1.D33 ; 28.64,3.58 27.59,4.62 21.07,4.62 18.73,6.96 v1(18.73,7.12) ; U1.J6 4.8,11.3 4.8,11.82 v1(5.17,12.19) ; 31.81,11.27 31.39,11.27 UD1.R33 ; v1(6.58,9.45) 7.09,9.45 7.12,9.48 U1.R7 ; 20.05,10.9 20.12,10.83 20.54,10.83 20.61,10.9 U1.AM28 ; v1(6.61,14.44) 6.34,14.44 6.33,14.43 5.91,14.43 U1.F12 ; 21.92,10.79 22.09,10.79 22.14,10.75 22.24,10.64 22.38,10.64 v1(22.63,10.39) ; 25.82,25.26 39.8,25.26 39.87,25.19 ; v1(14.67,14.77) 14.68,14.76 15.48,14.76 ; 21.03,14.69 21.15,14.82 21.53,14.82 v1(21.53,14.82) ; v1(42.67,17.44) 42.67,17.44 42.67,17.45 42.67,17.55 42.51,17.71 42.51,18.07 UD1.AN4 ; v1(20.07,19.01) 20.07,18.77 19.83,18.53 19.83,18.4 19.74,18.3 ; 39.13,24.34 v1(39.46,24.01) ; 37.71,23.45 26.93,23.45
  TOP w0.152: v1(30.48,18.26) 30.62,18.13 30.62,18.08 30.64,18.05 30.64,17.18 30.82,17.01 30.85,17.01 UD1.AJ34 ; v1(40.63,7) 40.66,6.97 40.69,6.97 41.01,6.65 41.01,6.19 40.95,6.13 ; v1(27,21.97) 26.94,21.91 25.93,21.91 25.57,21.55 v1(25.57,21.36) ; 28.64,3.58 30.26,1.95 ; v1(22.38,13.43) 22.23,13.43 22.14,13.34
  TOP w0.203: v1(39.78,6.5) 39.75,6.47 UD1.B12 ; v1(24.86,11.67) 24.51,11.67 24.14,11.3 23.25,11.3 23.23,11.32 22.46,11.32 22.27,11.51 ; UD1.B30 32.55,6.32 v1(32.72,6.49) ; UD1.AD33 31.68,14.91 v1(31.74,14.97) ; v1(43.29,12.4) 43.4,12.51 UD1.V2 ; UD1.B24 34.95,6.71 35.24,7.01 v1(35.37,7.01) ; v1(33.75,6.48) UD1.B27 ; UD1.AK2 43.44,17.31 43.42,17.29 v1(43.34,17.29) ; v1(12.21,6.74) 12.05,6.57 11.64,6.57 U1.AE9 ; v1(38.42,17.92) 38.42,18.28 38.55,18.41 UD1.AN15 ; v1(42.77,14.5) 43.18,14.91 UD1.AD2 ; UD1.J2 43.62,8.91 43.53,8.82 43.07,8.82 v1(42.86,9.03) ; 16.87,13.37 17.59,13.37 v1(17.62,13.4) ; v1(33.62,19.54) 33.75,19.41 UD1.AP27 UD1.AN27 33.75,18.31 v1(33.58,18.14) ; v1(36.47,7.08) 36.15,6.76 UD1.B21 ; v1(43.37,10.11) 43.37,10.11 UD1.M2 ; v1(40.27,17.5) 40.68,17.92 40.68,18.26 40.55,18.4 UD1.AN10 ; UD1.B18 37.39,6.15 37.39,6.77 v1(37.24,6.92) ; UD1.B15 38.55,6.47 v1(38.55,6.48) ; UD1.R33 31.77,11.31 31.81,11.27 v1(31.92,11.38) ; v1(31.74,14.24) 31.61,14.11 UD1.AB33 ; U1.AH27 18.66,11.63 v1(18.56,11.63) ; CD44.2 30.05,14.28 v1(30.09,14.24) ; UD1.AG2 43.4,16.11 v1(43.32,16.18) ; UD1.K33 31.41,9.31 31.51,9.21 32.02,9.21 32.35,9.53 v1(32.35,9.63) 32.37,9.66 32.37,9.82 32.08,10.11 UD1.M33 UD1.M34 30.91,10.07 30.3,10.07 v1(29.95,10.42) ; v1(21.53,14.82) 21.6,14.82 22.32,15.54 22.55,15.63 ; v1(43.36,11.31) UD1.R2 ; v1(43.06,7.67) 43.1,7.71 UD1.F2 ; v1(36.57,17.67) 36.39,17.84 36.39,18.26 36.55,18.41 UD1.AN20 ; 12.91,17.24 12.59,16.92 v1(12.59,16.89) 12.29,16.58 12.29,15.99 12.3,15.97 ; 19.25,12.31 19.27,12.28 19.28,12.28 v1(19.68,11.89) ; UD1.B6 42.15,6.47 v1(42.11,6.51) ; UD1.AN29 UD1.AP29 32.95,18.97 32.56,19.36 v1(32.56,19.5) ; U1.AA30 17.58,14.83 v1(17.61,14.79) ; v1(32.21,12.95) 32.03,12.76 31.56,12.76 31.41,12.91 UD1.W33 ; v1(41.68,17.75) 41.75,17.82 UD1.AN7 ; v1(15.68,2.47) 15.77,2.57 15.77,2.91 ; U1.AJ23 18.21,10.47 18.21,10.56 v1(18.23,10.58) ; v1(42.44,13.71) UD1.AA2 ; 21.76,13.02 U1.AK32 ; v1(32.05,8.36) 32.05,8.36 31.69,8.36 31.44,8.11 UD1.G33 ; UD1.AN24 v1(34.95,18.12)
  TOP w0.254: UD1.AN17 37.75,18.5 37.75,17.58 38.09,17.24 v1(38.09,16.63) ; U1.Y18 12.67,11.92 12.63,11.92 ; U1.Y18 U1.AA18 ; U1.Y18 12.67,11.29 ; v1(14.93,13.01) 14.96,13.01 15.05,12.92 15.11,12.92 v1(15.41,12.62) 15.29,12.5 15.24,12.5 15.09,12.34 15.05,12.34 v1(15.01,12.31) ; v1(14.93,13.01) 14.93,13.1 14.75,13.29 U1.Y23 U1.Y22 ; v1(14.93,13.01) 14.93,12.85 U1.AA22 ; 11.47,12.33 11.21,12.07 U1.U16 ; 11.47,12.33 11.75,12.05 v1(11.85,12.05) ; 11.47,12.33 v1(11.15,12.65) 11.52,13.02 11.55,13.02 ; U1.AG30 20.05,13.72 20.26,13.52 v1(20.42,13.52) 20.55,13.52 U1.AH32 U1.AJ32 U1.AK32 ; U1.AA18 13.03,10.94 13.03,10.87 ; U1.AA18 13.6,10.98 v1(13.6,10.94) ; v1(20.57,3.57) 20.67,3.47 v1(22.46,3.47) 22.55,3.38 27.13,3.38 ; v1(11.85,12.05) 11.85,11.98 v1(12.37,11.46) ; v1(11.85,12.05) 11.95,11.95 ; 13.69,17.26 U1.N26 13.33,16.93 v1(13,17.26) ; v1(4.49,12.48) 4.67,12.48 U1.G8 4.85,12.69 v1(5.19,13.04) ; v1(4.49,12.48) 4.84,12.14 5.15,12.14 5.17,12.16 v1(5.17,12.19) ; v1(4.49,12.48) 4.49,13.02 U1.F8 ; v1(4.49,12.48) 4.49,12.48 3.96,12.48 U1.F6 ; v1(37.77,3.31) 37.76,3.33 37.7,3.33 ; v1(37.77,3.31) 37.17,3.31 v1(37.16,3.33) 37.23,3.41 CD11.2 36.5,3.83 CD38.2 ; v1(37.77,3.31) 37.79,3.33 ; v1(19.27,12.27) 19.25,12.29 19.25,12.31 19.29,12.31 ; 12.67,11.23 12.67,11.29 ; 12.67,11.23 12.31,10.87 ; 12.67,11.23 13.03,10.87 ; 12.67,11.29 12.54,11.29 v1(12.37,11.46) ; 8.04,10.89 U1.N10 8.02,11.6 ; 8.04,10.89 8.4,10.52 8.4,10.49 8.42,10.49 8.4,10.47 8.38,10.47 8.38,10.47 8.31,10.47 U1.R7 ; 8.04,10.89 8.38,11.24 U1.P11 v1(8.74,11.6) ; 46.41,13.07 46.86,13.07 v1(46.89,13.04) ; v1(9.82,13.33) 10.13,13.02 U1.P16 ; v1(9.82,13.33) 9.75,13.33 U1.N15 9.09,13.37 U1.M13 ; v1(9.82,13.33) 9.82,13.4 10.18,13.76 ; 11.92,11.25 U1.W16 11.93,11.25 12.31,10.87 ; 11.92,11.25 U1.W15 ; 11.92,11.25 11.59,11.58 11.59,11.59 ; 11.92,11.25 12.11,11.44 12.35,11.44 v1(12.37,11.46) ; 46.41,12.43 46.84,12.43 v1(46.84,12.44) ; 10.18,13.76 10.18,13.76 v1(9.81,14.13) ; 10.18,13.76 10.19,13.76 U1.N18 U1.N19 ; 16.87,16.2 16.95,16.2 v1(17.29,15.86) ; 15.48,14.81 15.81,14.48 U1.Y26 ; 15.48,14.81 v1(15.48,15.47) ; 15.48,14.81 U1.W27 ; U1.AK11 14.11,5.59 v1(14.43,5.91) U1.AL12 U1.AL13 U1.AL14 ; v1(15.77,10.23) 15.81,10.23 16.14,10.56 ; v1(15.77,10.23) 15.45,10.54 U1.AE20 ; v1(15.77,10.23) 15.77,10.18 15.46,9.88 ; v1(18.56,11.63) 18.28,11.35 U1.AH25 ; v1(23.32,12.44) 23.28,12.44 23.15,12.31 U1.AN33 ; U1.AD11 11.83,7.63 v1(11.83,7.08) ; U1.AD11 11.67,7.96 v1(11.67,8.28) ; U1.AD11 12.18,7.98 12.23,7.98 v1(12.27,8.02) ; U1.W15 10.93,11.53 10.93,11.6 v1(10.9,11.64) ; U1.W15 11.19,10.52 ; U1.W15 U1.Y15 ; UD1.AJ33 UD1.AJ34 ; v1(13.6,10.94) 13.64,10.94 14.03,11.32 v1(14.19,11.32) 14.57,11.71 v1(14.57,11.91) ; v1(13.6,10.94) 13.6,10.81 U1.AB17 ; 16.14,10.56 16.14,10.56 U1.AE21 ; 16.14,10.56 16.46,10.88 v1(16.46,10.95) ; U1.AG28 19.26,12.39 19.3,12.39 19.35,12.34 19.33,12.34 ; U1.AD14 U1.AD13 12.63,8.37 v1(12.27,8.02) ; U1.AD14 U1.AB14 U1.AB15 ; U1.AD14 U1.AE14 ; v1(46.87,11.72) 46.41,11.72 ; v1(12.21,6.74) 12.17,6.74 v1(11.83,7.08) ; U1.AE20 U1.AD20 U1.AD21 U1.AD22 ; U1.AE20 U1.AE19 ; U1.AE20 U1.AE21 ; 11.55,13.02 U1.T18 ; 11.55,13.02 11.22,12.68 11.22,12.67 U1.T16 ; U1.W27 15.81,15.09 15.48,14.76 U1.Y26 ; U1.W27 v1(15.48,15.47) ; v1(10.53,9.16) v1(10.89,8.8) ; v1(25.57,21.36) 25.57,19.99 23.45,17.88 ; U1.N12 8.03,11.6 8.02,11.6 ; U1.N12 v1(8.74,11.6) ; U1.N12 8.03,12.31 ; v1(20.09,8.5) 19.92,8.67 19.92,8.91 ; 12.63,11.92 12.27,12.27 12.27,12.31 ; 12.63,11.92 12.37,11.66 v1(12.37,11.46) ; 16.87,13.37 16.85,13.37 16.5,13.72 v1(16.49,13.72) 16.49,13.74 16.16,14.06 U1.AA26 U1.Y26 ; 21.29,10.37 U1.AN28 U1.AM28 U1.AM29 ; U1.J9 5.74,12.14 5.3,12.14 5.24,12.19 v1(5.17,12.19) ; U1.J9 U1.K9 U1.K10 ; U1.J9 U1.J10 ; U1.J9 5.91,12.32 5.62,12.61 ; U1.K12 6.99,12.68 6.95,12.68 ; U1.K12 U1.J12 ; U1.K12 U1.L12 ; 37.79,3.33 38.42,3.33 38.86,3.76 39.28,3.76 ; 37.79,3.33 37.97,3.51 CD53.2 ; U1.AE21 U1.AE22 ; 6.95,12.68 6.95,12.68 ; 6.95,12.68 U1.K11 v1(7.31,12.32) 7.32,12.31 ; 6.95,12.68 6.95,12.68 6.62,13.02 U1.J12 ; 6.95,12.68 6.95,12.64 U1.K10 ; v1(46.85,10.7) 46.41,10.7 ; U1.AL3 11.5,2.41 v1(11.18,2.73) ; v1(0.2,12.83) 0.24,12.78 0.24,12.51 0.25,12.5 U1.A1 ; v1(19.67,10.51) U1.AL25 U1.AK25 19.3,10.85 v1(19.3,10.89) 19.67,10.52 v1(19.67,10.51) ; v1(19.67,10.51) 20,10.19 U1.AM26 ; v1(19.67,10.51) 20.05,10.9 ; U1.AD22 16.07,11.87 v1(16.25,11.87) U1.AE23 ; U1.AD22 U1.AE22 ; v1(16.46,10.95) U1.AE22 ; v1(16.46,10.95) 16.5,10.95 16.78,11.24 16.86,11.24 16.86,11.26 ; U1.AE22 U1.AE23 ; 13.33,15.86 13.35,15.88 v1(13.41,15.95) 13.33,15.86 ; 13.33,15.86 13.31,15.85 U1.P24 ; 13.33,15.86 U1.R24 13.69,15.14 ; v1(19.68,12.58) 19.67,12.58 19.43,12.35 19.33,12.35 19.29,12.31 ; v1(17.13,11.6) 17.15,11.62 17.31,11.62 17.63,11.95 ; v1(17.13,11.6) 17.13,11.55 16.86,11.28 16.86,11.26 ; v1(17.13,11.6) 17.13,11.69 16.87,11.96 ; 15.1,20.09 15.99,20.97 v1(16.52,20.97) ; U1.U14 v1(10.9,11.64) ; U1.U14 10.83,10.93 v1(10.83,10.89) 10.84,10.87 10.87,10.87 ; U1.U14 10.2,11.55 v1(10.16,11.55) ; v1(10.9,11.64) 10.58,11.96 U1.T15 ; v1(10.9,11.64) U1.U16 ; 10.87,10.87 11.2,11.21 11.22,11.21 v1(11.23,11.22) 11.25,11.24 11.25,11.26 11.59,11.59 ; 10.87,10.87 11.19,10.55 11.19,10.52 ; 13.69,4.53 13.84,4.68 13.84,4.69 v1(14.04,4.9) ; v1(11.83,7.08) 11.83,6.92 U1.AE9 U1.AD9 11.28,7.08 v1(11.83,7.08) ; 39.99,3.76 39.99,3.54 40.25,3.28 v1(40.4,3.28) ; 39.99,3.76 39.28,3.76 ; 39.99,3.76 40.17,3.76 40.42,4.02 40.42,4.49 v1(40.79,4.86) ; v1(11.96,20.41) 11.96,20.4 12.27,20.09 ; U1.G10 5.55,13.37 ; 5.55,13.37 U1.F10 ; 5.55,13.37 v1(5.94,12.98) ; 5.55,13.37 5.53,13.37 v1(5.19,13.04) ; U1.AC1 8.01,4.53 v1(7.65,4.18) ; U1.AA16 12.31,10.86 12.31,10.87 ; U1.AA16 v1(12.96,10.21) ; U1.AA16 12.96,10.87 13.03,10.87 ; U1.AA16 U1.AA15 ; v1(13.35,17.63) 13.31,17.63 13,17.32 v1(13,17.26) ; v1(13.35,17.63) 13.02,17.97 U1.L27 12.9,18.04 12.35,18.04 U1.K26 ; v1(13.35,17.63) 13.35,17.59 U1.N27 14.02,16.93 v1(14.06,16.93) 14.06,16.89 U1.R27 14.73,16.22 v1(14.77,16.22) 15.1,15.89 U1.U27 v1(15.48,15.47) ; v1(13.35,17.63) 13.71,17.99 v1(13.75,17.99) ; 5.94,12.97 U1.J10 ; 5.94,12.97 v1(5.94,12.98) ; 5.94,12.97 5.58,12.61 ; 5.94,12.97 v1(5.94,12.98) ; U1.J10 U1.K10 ; U1.J10 6.28,12.66 v1(6.62,13) ; v1(20.07,19.01) 20.15,19.09 20.15,19.41 ; U1.V19 11.95,11.98 11.95,11.95 ; U1.M13 U1.L13 U1.L12 ; U1.M13 8.03,12.31 ; v1(5.19,13.04) 5.55,12.68 v1(5.55,12.61) 5.58,12.61 ; v1(5.19,13.04) v1(4.83,13.4) 4.88,13.4 U1.F10 ; v1(30.01,13.11) 30.01,13.11 CD45.2 ; v1(9.78,4.12) 10.07,3.82 U1.AG3 ; U1.T16 U1.T15 ; U1.T16 U1.U16 ; 45.61,18.75 45.61,19.84 CD42.2 46.3,19.85 v1(46.36,19.79) 46.36,19.59 v1(46.61,19.33) ; v1(13,17.26) 12.93,17.26 12.91,17.24 ; U1.AE12 12.36,7.98 12.32,7.98 v1(12.27,8.02) ; v1(11.99,18.91) 12.51,18.91 U1.J28 12.68,19.03 v1(13.01,18.7) ; U1.F12 5.89,14.43 v1(5.55,14.08) 5.2,13.74 U1.F10 ; 13.69,15.14 14.04,14.78 14.04,14.68 v1(14.31,14.41) ; 13.69,15.14 13.75,15.14 v1(14.08,15.47) 14.39,15.15 U1.U25 ; 15.46,9.88 v1(15.08,9.5) U1.AE18 U1.AE19 ; 15.46,9.88 15.41,9.88 U1.AE19 ; 19.29,12.31 19.33,12.34 ; U1.K10 U1.L10 7.32,12.31 ; 12.31,10.87 12.25,10.87 U1.Y15 ; 19.33,12.34 19.25,12.34 18.99,12.08 U1.AH27 U1.AJ27 19.63,11.89 v1(19.68,11.89) 19.75,11.96 U1.AK29 ; 7.32,12.31 7.67,11.96 7.67,11.95 ; 7.32,12.31 U1.L12 ; v1(8.91,15.9) 8.6,16.2 U1.G18 ; v1(14.31,14.41) 14.31,14.41 v1(14.67,14.77) ; v1(14.31,14.41) 13.97,14.06 13.97,13.44 U1.W22 U1.Y22 ; v1(12.27,8.02) 12.01,8.28 v1(11.67,8.28) ; v1(46.64,17.03) 46.22,17.03 ; v1(12.96,10.21) 12.96,10.16 U1.AB15 ; v1(12.96,10.21) 13,10.21 U1.AB17 ; 17.63,11.95 17.63,11.9 U1.AG25 ; 17.63,11.95 17.54,11.95 v1(17.53,11.96) ; v1(2.7,11.21) 2.77,11.21 U1.G3 ; v1(2.02,11.89) 2.31,11.6 U1.E3 ; U1.AB15 U1.AA15 ; U1.AE23 16.86,11.26 ; U1.AE23 16.87,11.96 ; U1.Y22 14.39,12.96 14.69,12.66 U1.AA22 ; U1.L12 8.03,12.31 ; 8.02,11.6 7.67,11.95 ; v1(34.1,2.98) v1(34.67,2.98) 34.75,3.07 CD51.2 34.72,3.78 CD50.2 33.96,3.81 CD47.2 ; U1.L30 14.11,19.03 v1(14.43,18.71) 14.75,18.39 U1.N30 ; v1(44.87,19.97) 44.62,19.97 44.41,20.18 44.31,20.18 ; U1.AG7 U1.AH7 11.71,4.67 v1(11.71,4.44) ; 16.87,11.96 U1.AE25 ; v1(14.57,11.91) 14.57,11.95 14.39,12.13 U1.AA21 U1.AA22 ; v1(14.57,11.91) 14.62,11.91 v1(15.01,12.31) ; U1.AB12 11.67,8.67 v1(11.67,8.28) ; v1(10.16,11.55) 10.16,11.61 U1.T15 ; v1(10.16,11.55) 10.03,11.68 9.53,11.68 U1.R13 9.09,11.25 v1(8.74,11.6) ; U1.U16 v1(11.55,11.61) 11.58,11.59 11.59,11.59 ; U1.AJ19 v1(16.83,9.09) 16.88,9.13 U1.AJ21 17.22,9.57 17.48,9.82 v1(17.56,9.82) 17.56,9.91 17.84,10.19 U1.AJ23 ; U1.Y15 U1.AA15 ; v1(11.67,8.28) 11.35,8.28 U1.AB11 U1.AB10 ; 5.62,12.61 5.24,12.23 5.21,12.23 v1(5.17,12.19) ; 5.62,12.61 5.58,12.61 ; 31.99,3.52 32.39,3.12 32.48,3.12 v1(32.61,2.99) ; v1(46.76,15.83) 46.32,15.83 ; RD10.1 29.55,15.49 v1(29.55,15.02) ; 34.09,2.99 33.49,3.59 33.13,3.59 32.9,3.36 ; U1.AN18 17.58,6.92 18.14,6.36 18.14,6.31 v1(18.36,6.09) 18.37,6.08 18.39,6.08 20.89,3.58 26.93,3.58 27.13,3.38 ; 7.67,11.95 8.03,12.31 ; 12.95,5.92 v1(13.01,5.92) 12.68,5.59 U1.AH9 ; U1.J12 U1.J13 ; U1.J12 7.32,13.72 U1.J13 ; 23.58,16.66 24.14,16.66 v1(24.57,17.09) 24.79,17.32 24.79,17.88 ; 23.58,16.66 22.55,15.63 ; 23.58,16.66 24.79,17.88 ; v1(28.9,8.02) 29.02,8.14 CD49.2 29.02,8.99 29.02,8.99 CD46.2 28.92,8.95 v1(28.37,8.95) ; U1.AA22 15,12.41 15,12.32 v1(15.01,12.31) ; 44.01,0.75 29.76,0.75 v1(28.61,1.9) 27.13,3.38 ; U1.AJ13 14.46,6.65 v1(14.78,6.98) ; CD48.2 28.7,5.78 29.29,5.19 29.54,5.19 29.59,5.13 29.63,5.13 29.67,5.1 v1(29.76,5.1) ; v1(17.53,11.96) 17.64,12.08 17.64,12.59 U1.AE26 U1.AE25 ; v1(17.53,11.96) 17.53,12.01 U1.AE25 ; v1(36.86,19.79) 36.86,20.08 CD12.2 CD18.2 ; 24.79,17.88 24.79,17.89 27.03,20.13 27.03,21.94 v1(27,21.97) ; v1(24.86,11.67) 24.91,11.62 26.28,11.62 v1(26.4,11.5) ; 11.59,11.59 11.95,11.95 ; U1.J13 v1(6.61,14.44) 6.62,14.44 U1.G14 ; v1(8.4,10.48) 8.4,10.56 U1.R11 9.06,11.22 v1(9.11,11.22) ; 46.12,8.35 45.81,8.35 45.34,8.82 v1(45.06,8.82) ; U1.AN1 11.57,0.66 v1(11.45,0.54) ; U1.AB17 13.03,10.85 13.03,10.87 ; v1(46.65,17.94) 46.16,17.94 ; U1.N22 11.92,15.59 12.3,15.97 ; U1.P19 11.55,14.42 v1(11.55,14.44) v1(11.19,14.8) 11.19,14.77 U1.N19 ; U1.P19 U1.R19 ; U1.P19 U1.N19 ; 39.28,3.76 39.28,3.49 39.41,3.36 v1(39.41,3.32) ; CD17.2 30.74,5.07 v1(30.68,5.13) 30.5,5.31 30.5,5.65 ; v1(8.43,8.47) 8.12,8.77 U1.U7 7.32,9.48 ; 11.19,10.52 v1(11.17,10.5) U1.W13 U1.W12 ; v1(11.54,10.14) v1(11.9,9.77) ; v1(12.26,3.8) 11.93,3.47 U1.AK5 ; v1(6.58,9.45) 6.26,9.77 U1.N6 6.22,9.83 v1(5.88,10.18) 5.55,10.5 U1.L6 5.55,10.58 v1(5.22,10.91) 4.88,11.25 U1.J6 ; 22.27,11.51 U1.AN31 ; v1(44.62,5.87) 44.54,5.87 44.52,5.9 ; v1(9.59,9.93) 9.79,10.13 v1(10.13,10.13) v1(10.49,10.49) ; v1(5.86,18.99) 5.95,18.9 6.06,18.9 ; U1.AG6 11.21,4.91 v1(10.87,5.25) ; 46.41,10.07 v1(46.85,10.07) ; v1(13.35,6.99) 13.02,6.65 U1.AG11 ; 18.95,13.37 v1(18.95,13.37) 18.64,13.68 U1.AE29 18.64,13.85 18.06,14.43 U1.AC29 17.93,14.47 v1(17.61,14.79)
  TOP w0.305: 31.63,3.22 31.94,3.52 32.26,3.52 32.61,3.17 32.61,3.07 ; 31.63,3.22 31.63,3.22 31.19,3.66 30.96,3.66 30.6,4.02 30.6,4.22 ; 31.63,3.22 v1(31.63,3)
  TOP w0.381: 30.6,4.22 30.6,4.53 30.68,4.62 v1(30.68,5.13) ; v1(45.02,18.75) 45.61,18.75 45.83,18.96 ; 45.83,18.96 46.04,18.75 v1(46.63,18.75) ; 45.83,18.96 46.08,19.21 46.49,19.21 v1(46.61,19.33) ; v1(46.85,10.07) 46.69,9.91 46.69,8.17 ; v1(32.61,2.99) 32.61,3.07 32.9,3.36 33.28,2.99 34.09,2.99 34.09,2.98 v1(34.1,2.98) ; 46.12,8.35 46.51,8.35 46.69,8.17 ; v1(46.85,6.76) v1(46.85,8.01) 46.69,8.17 ; CD1.2 24.93,16.73 v1(24.57,17.09)
  TOP w0.406: v1(29.95,10.42) 29.72,10.42 CD37.2
  L2GND w0.076: 34.33,5.08 34.36,5.05 34.36,4.94 34.35,4.93 34.35,4.67 34.33,4.66
  L3 w0.076: 18.35,6.09 v1(18.36,6.09)
  L3 w0.127: v1(41.23,24.98) 41.84,24.98 v1(41.88,25.02) 41.92,24.98 v1(42.68,24.98) 43.06,24.98 v1(43.7,24.34) v1(44.6,23.44) v1(45.5,22.54) v1(46.4,21.65) ; v1(41.93,0.22) 41.79,0.08 38.3,0.08 v1(38.22,0.16) 38.14,0.08 34.32,0.08 v1(34.23,0.17) 34.12,0.05 30.84,0.05 v1(30.72,0.16) 30.63,0.06 27.5,0.06 v1(25.99,1.58) 24.43,3.14 22.79,3.14 v1(22.46,3.47)
  L3 w0.178: 18.48,17.51 19.98,19.01 v1(20.07,19.01)
  L3 w0.203: 18.48,17.51 18.48,17.19 17.29,16 v1(17.29,15.86)
  L3 w0.254: v1(22.46,3.47) 22.36,3.57 v1(20.57,3.57) 18.36,5.78 v1(18.36,6.09) ; v1(20.07,19.01) 20.07,19.24 20.59,19.75 20.59,20.51 22.53,22.45 v1(22.62,22.45) 22.62,22.61 25.09,25.07 v1(25.22,25.07) ; v1(46.4,21.65) 46.36,21.6 v1(46.36,19.79) 46.36,19.59 v1(46.61,19.33) 46.63,19.31 46.63,18.75 v1(46.63,18.75) 46.63,17.96 v1(46.65,17.94) 46.62,17.91 46.62,16.41 v1(46.6,16.4) 46.6,15.99 v1(46.76,15.83) 46.76,13.17 v1(46.89,13.04) 46.84,13 v1(46.84,12.44) 46.87,12.41 v1(46.87,11.72) 46.87,10.72 v1(46.85,10.7) 46.85,10.7 v1(46.85,10.07) ; 41.95,0.22 v1(41.93,0.22)
  L3 w0.381: v1(46.85,10.07) 47.74,9.17 47.74,8.24 ; v1(46.85,8.01) 47,7.87 47.43,7.87 47.74,8.17 47.74,8.24 ; 47.74,8.24 48.05,7.93 48.05,6.3
  L4 w0.076: v1(41.23,24.98) 40.95,24.98 40.59,25.33 40.5,25.33 40.47,25.36 25.51,25.36 25.3,25.15 25.29,25.14 25.28,25.14 ; 23.12,25.2 23.19,25.27
  L4 w0.102: v1(25.22,25.07) 25.5,25.35 40.85,25.35 v1(41.23,24.98)
  L4 w0.254: v1(19.68,11.89) 18.82,11.89 v1(18.56,11.63) ; 18.19,17.36 17.98,17.15 17.98,17.08 17.29,16.39 v1(17.29,15.86)
  L5GND w0.076: 36.86,19.79 v1(36.86,19.79)
  BOTTOM w0.076: v1(45.09,3.07) 45.25,3.23 46.27,3.23 v1(46.7,3.66) ; 16.95,13.26 16.9,13.21 16.9,12.63 16.95,12.58
  BOTTOM w0.102: v1(46.85,8.01) v1(46.85,10.07) ; 47.74,14.42 47.9,14.26
  BOTTOM w0.127: 47.86,2.23 48.35,2.72 48.35,9.93 47.9,10.38 47.9,14.26 ; v1(46.85,6.76) 46.85,6.59 47.63,5.81 47.63,3.22 46.29,1.89 v1(45.4,1.89) ; v1(46.85,8.01) 46.85,6.94 ; v1(46.89,13.04) 46.89,12.48 v1(46.84,12.44) 46.87,12.41 v1(46.87,11.72) 46.85,11.7 v1(46.85,10.7) 46.85,10.7 v1(46.85,10.07)
  BOTTOM w0.152: v1(45.4,1.89) 45.35,1.94 39.96,1.94 v1(39.94,1.92)
  BOTTOM w0.203: v1(28.37,8.95) 28.39,8.96 28.53,8.96 28.57,9.01 28.62,9.01 28.98,9.36 CD13.2 ; CD14.2 44.64,5.9 v1(44.62,5.87) 44.26,5.87 44.1,6.04 CD40.2 ; CD52.2 41.77,6.17 v1(42.11,6.51) ; CD34.2 43.36,7.67 v1(43.06,7.67) ; CD15.2 30.36,14.24 v1(30.09,14.24) 30.09,14.25 CD35.2 ; v1(37.77,3.31) 37.77,2.77 38.62,1.92 v1(39.94,1.92) ; CD43.2 43.9,17.35 43.84,17.35 ; 31.58,15.14 v1(31.74,14.97)
  BOTTOM w0.254: CD33.2 31.89,11.34 v1(31.92,11.38) ; RD2.1 39.94,17.18 v1(40.27,17.5) 40.42,17.66 CD22.2 ; v1(40.4,3.28) 40.8,3.68 43.37,3.68 43.98,3.07 v1(45.09,3.07) ; CD10.2 38.64,20.15 v1(38.87,19.92) ; v1(34.95,18.12) 34.63,18.44 CD67.2 ; RD9.1 46.87,8.03 v1(46.85,8.01) ; v1(31.74,14.24) 31.74,14.43 CD24.2 31.74,14.55 v1(31.74,14.97) ; v1(37.77,3.31) 37.76,3.33 v1(37.16,3.33) ; CD23.2 37.2,16.63 v1(38.09,16.63) 38.31,16.85 RD8.1 38.31,17.82 v1(38.42,17.92) ; v1(46.85,6.76) 46.85,6.94 47.21,7.31 CD25.2 ; v1(33.62,19.54) 33.55,19.48 33.55,19.03 CD68.2 ; v1(32.35,9.63) 32.31,9.67 CD41.2 ; 43.84,17.35 43.48,17.35 43.42,17.29 v1(43.34,17.29) 43.32,17.26 42.85,17.26 42.68,17.44 v1(42.67,17.44) ; v1(18.95,13.37) 18.67,13.65 CD7.2 ; v1(32.72,6.49) 32.44,6.22 CD39.2 ; v1(30.68,5.13) 30.9,5.35 CD16.2
  BOTTOM w0.381: CD26.2 47.24,9.68 v1(46.85,10.07)
  vias: v1(12.27,10.84) v1(12.98,10.85) v1(15.87,17.27) v1(21.29,6.59) v1(22.02,4.67) v1(23.25,15.04) v1(23.64,13.61) v1(24.17,19.24) v1(24.25,4.68) v1(24.26,12.25) v1(25.01,14.69) v1(25.26,6.66) v1(25.93,14.34) v1(26.36,6.55) v1(26.46,12.45) v1(26.78,15.25) v1(27.59,15.81) v1(27.98,5.09) v1(28.23,17.75) v1(28.33,6.49) v1(28.86,20.72) v1(29.41,3.04) v1(29.91,22.13) v1(30.38,16.14) v1(32.2,17.45) v1(33.58,16.25) v1(34.14,15.76) v1(34.67,15.24) v1(35.16,14.74) v1(35.71,14.28) v1(36.03,22.27) v1(36.36,13.59) v1(37.26,12.63) v1(37.8,22.2) v1(37.79,12.11) v1(38.29,10.85) v1(38.44,22.97) v1(39.08,10.26) v1(39.87,21.19) v1(40.2,10.34) v1(40.36,20.54) v1(40.39,9.51) v1(40.91,8.98) v1(41.44,8.45) v1(42.19,23.83) v1(43.04,20.94) v1(43.06,19.89) v1(43.37,22.78) v1(44.36,0.2) v1(44.8,24.81) v1(44.86,20.52) v1(45.37,4.06) v1(46.05,23.33) v1(46.83,24.39) v1(46.95,0.37) v1(47.11,22.33) v1(47.29,20.75) v1(47.54,24.27) v1(47.69,22.6) v1(48.17,1.96)
VCC-DRAM: length 98.4
  TOP w0.152: UD1.A16 38.15,5.42 38.3,5.26 38.3,4.59 v1(38.26,4.55) ; 30.04,6.13 30.49,6.13 30.74,6.39 30.83,6.39 UD1.C34
  TOP w0.178: UD1.AH34 30.86,16.59 30.82,16.59 30.52,16.89 v1(30.33,16.89)
  TOP w0.203: v1(45.02,18.11) UD1.AM1 UD1.AL1 ; v1(39.76,4.72) 39.85,4.72 40.22,5.09 40.22,5.64 UD1.A11 UD1.A10 ; UD1.W1 44.95,12.91 v1(45.13,12.73) ; 44.77,14.48 44.18,14.48 UD1.AC1 44.15,14.48 ; UD1.AB34 30.95,14.1 30.95,13.72 ; v1(45.15,17.01) 45.08,16.95 44.18,16.95 UD1.AJ1 ; v1(30.49,10.51) UD1.N34 ; UD1.AP11 40.15,19.64 v1(40.26,19.75) ; UD1.AP6 42.15,19.06 42.37,19.29 42.37,19.76 42.07,20.07 v1(41.98,20.07) ; v1(32.86,4.93) 32.95,5.02 UD1.A29 ; UD1.W34 30.9,12.87 30.75,12.87 30.59,12.7 29.89,12.7 29.8,12.61 CD45.1 29.61,12.61 29.35,12.87 29.35,13.42 29.72,13.78 CD44.1 ; UD1.N1 44.17,10.49 45.28,10.49 45.28,10.49 ; v1(41.75,5.21) 41.75,5.22 UD1.A7 ; UD1.AP24 v1(34.95,19.4) ; 45.39,15.71 44.68,15.71 44.67,15.73 v1(44.66,15.73) 44.65,15.71 UD1.AF1 ; v1(36.35,19.76) 36.35,19.22 36.55,19.02 UD1.AP20 ; v1(39.24,4.79) 39.35,4.9 UD1.A13 ; UD1.A26 34.19,5.67 34.19,4.99 v1(33.99,4.8) ; UD1.A20 36.55,5.57 36.42,5.45 36.42,4.99 36.64,4.77 v1(36.64,4.76) ; 30.95,13.72 30.94,13.73 v1(30.17,13.73) ; 30.95,13.72 UD1.AA34 ; UD1.A3 43.4,5.66 v1(43.4,5.2) ; UD1.AP14 38.95,19.31 v1(38.86,19.4) ; UD1.C1 44.42,6.51 44.54,6.39 v1(44.62,6.39) ; v1(44.67,8.12) 44.66,8.11 UD1.G1 ; v1(33.07,19.53) 33.07,19.41 33.35,19.13 UD1.AP28 ; v1(30.52,11.31) UD1.R34 ; v1(30.55,15.25) 30.62,15.31 UD1.AE34 ; v1(44.88,19.44) 44.34,19.44 43.76,20.02 CD27.1 43.56,19.98 43.56,19.23 43.35,19.01 UD1.AP3 ; UD1.A32 31.75,5.14 v1(31.76,5.12) ; 34.71,4.31 CD51.1 34.92,4.31 35.2,4.6 v1(35.2,4.76) 35.2,4.87 35.34,5.01 35.34,5.71 UD1.A23 ; CD59.1 UD1.T1
  TOP w0.254: 15.73,13.74 v1(15.78,13.78) 15.75,13.78 15.44,14.09 ; 15.73,13.74 15.73,13.67 15.45,13.39 U1.AA24 ; 15.73,13.74 16.1,13.37 16.12,13.37 v1(16.13,13.35) 16.13,13.35 ; v1(45.15,17.01) 45.17,17.01 45.19,17.03 CD56.1 ; v1(45.62,9.67) 45.34,9.95 45.33,9.95 v1(45.25,10.04) ; v1(45.62,9.67) 45.52,9.58 44.39,9.58 44.26,9.71 UD1.L1 UD1.K1 ; v1(45.62,9.67) 45.86,9.92 CD31.1 45.84,10.09 CD30.1 ; v1(14.35,10.2) 14.7,10.55 v1(14.79,10.55) 14.44,10.9 U1.AC19 ; v1(14.35,10.2) 14.03,9.89 14.03,9.87 v1(14,9.84) 14,9.85 13.69,10.16 13.69,10.19 U1.AC18 ; v1(14.35,10.2) 14.35,10.23 U1.AC18 ; U1.AC18 U1.AC19 ; U1.AC24 16.19,12.66 v1(16.53,12.32) ; U1.AC24 U1.AB24 ; U1.AC24 16.16,12.54 15.58,11.96 U1.AC22 15.16,11.67 15.16,11.62 v1(15.14,11.59) 15.1,11.56 15.05,11.56 U1.AC20 U1.AC19 ; UD1.AP26 v1(34.15,19.52) ; U1.AA24 U1.AB24 ; U1.AA24 U1.Y24 ; v1(30.01,9.66) 30.01,9.6 29.52,9.1 CD46.1 29.52,8.37 CD49.1 29.67,8.37 v1(29.96,8.08) 29.96,8 30.04,7.92 30.04,7.89 30.29,7.64 30.32,7.64 30.35,7.6 30.78,7.6 30.88,7.71 UD1.F34 ; v1(30.01,9.66) 30.25,9.66 30.3,9.71 UD1.L34 UD1.K34 ; v1(30.01,9.66) 29.93,9.58 29.57,9.58 CD37.1 ; UD1.AP18 UD1.AP17 37.75,19.73 v1(37.72,19.75) 37.75,19.78 CD18.1 ; v1(16.55,13.02) 16.45,13.02 16.13,13.35 ; v1(45.13,12.73) 45.22,12.73 45.36,12.59 45.38,12.57 45.42,12.53 45.65,12.53 45.72,12.46 45.78,12.46 45.81,12.43 CD29.1 45.86,12.43 CD59.1 45.86,11.26 ; 15.44,14.09 U1.W25 U1.W24 ; 15.44,14.09 15.44,14.06 U1.Y24 ; CD30.1 45.46,10.67 v1(45.34,10.55) 45.28,10.49 ; CD30.1 45.86,10.7 45.86,11.26 ; 45.39,15.71 45.65,15.71 CD57.1 CD58.1 45.76,15.18 45.47,15.18 44.77,14.48 ; U1.W24 U1.Y24 ; U1.W24 U1.W23 ; v1(39.76,4.72) 39.99,4.49 CD55.1 ; v1(45.02,18.11) 45.02,18.08 45.16,17.94 CD28.1 ; v1(36.35,19.76) 36.35,19.96 36.14,20.16 CD12.1 ; v1(41.98,20.07) 41.98,20.58 41.98,20.59 v1(41.98,20.59) 41.81,20.42 41.58,20.42 ; CD38.1 36.45,4.57 v1(36.64,4.76) 37.08,4.33 CD11.1 37.95,4.33 CD53.1 38.21,4.55 v1(38.26,4.55) ; UD1.AP11 UD1.AP10 ; CD50.1 33.96,4.31 CD47.1 33.14,4.43 CD17.1 31.74,4.85 31.74,4.88 ; U1.AB24 16.13,13.33 16.13,13.35 ; 30.04,6.13 29.73,5.82 v1(29.7,5.82) 29.6,5.92 CD48.1 ; CD54.1 39.28,4.75 v1(39.24,4.79) ; 45.86,11.26 v1(45.54,11.26) ; CD44.1 30.12,13.78 v1(30.17,13.73) ; UD1.AB1 44.15,14.48 ; UD1.A19 UD1.A20 ; UD1.A32 UD1.A31
  TOP w0.305: 33.67,4.31 33.62,4.26 33.45,4.26 ; 33.67,4.31 33.99,4.64 33.99,4.67 ; 33.67,4.31 34.35,4.31 ; 41.75,20.82 42.13,21.19 CD8.1 42.21,20.83 v1(41.98,20.59) 41.75,20.82 ; 41.75,20.82 CD19.1 41.29,20.71 41.86,20.14 41.91,20.14 v1(41.98,20.07) ; 32.3,4.31 31.74,4.88 31.74,5.1 v1(31.76,5.12) 31.76,4.91 32.3,4.36 32.3,4.31 ; 32.3,4.31 32.38,4.31 ; 32.38,4.31 32.86,4.79 ; 32.38,4.31 33.4,4.31 33.45,4.26 ; 32.86,4.79 32.86,4.58 33.18,4.26 33.45,4.26 ; 32.86,4.79 v1(32.86,4.93) ; v1(33.99,4.8) 33.99,4.67 ; 33.99,4.67 34.35,4.31 ; 34.35,4.31 34.71,4.31
  TOP w0.381: v1(25.27,17.33) 25.51,17.57 CD1.1 ; v1(46.02,14.69) 45.77,14.94 CD58.1
  L3 w0.076: 36.23,13.11 36.05,12.93 36.05,12.86
  L3 w0.089: 35.06,15.12 34.79,14.85 34.78,14.85
  BOTTOM w0.203: v1(30.01,9.66) 29.92,9.57 CD13.1
  BOTTOM w0.254: 38.64,19.4 38.39,19.65 CD10.1 ; 38.64,19.4 RD6.2 ; 38.64,19.4 v1(38.86,19.4) ; v1(41.75,5.21) 41.77,5.24 CD52.1 ; v1(29.7,5.82) 29.79,5.82 29.86,5.75 CD16.1 ; v1(47.21,8.59) 47.25,8.63 RD5.2 ; v1(44.88,19.44) 44.94,19.51 CD9.1 ; CD33.1 30.55,11.34 v1(30.52,11.31) ; v1(34.95,19.4) 34.85,19.29 34.85,19.27 CD67.1 34.15,19.31 v1(34.15,19.52) ; v1(30.33,16.89) 30.33,17.25 CD36.1 ; CD15.1 30.5,15.2 v1(30.55,15.25) ; v1(44.62,6.39) 44.63,6.4 CD14.1 ; v1(30.17,13.73) 30.16,13.75 CD35.1 ; CD68.1 33,19.46 v1(33.07,19.53) ; v1(44.67,8.12) 44.51,7.96 CD34.1
